# Altium PCB Digital_Input_PCB.PcbDoc (part 1 of 3)
Units mil, origin at the board's own origin, x right, y up, seen from the top; angles counter-clockwise.
Board outline 5600 x 4000 mil, 4 copper layers (Top Layer, Plane(Gnd), Plane(Power), Bottom Layer), stack 23.756 mil thick; 260 components, 287 nets, 712 pads, 291 vias.
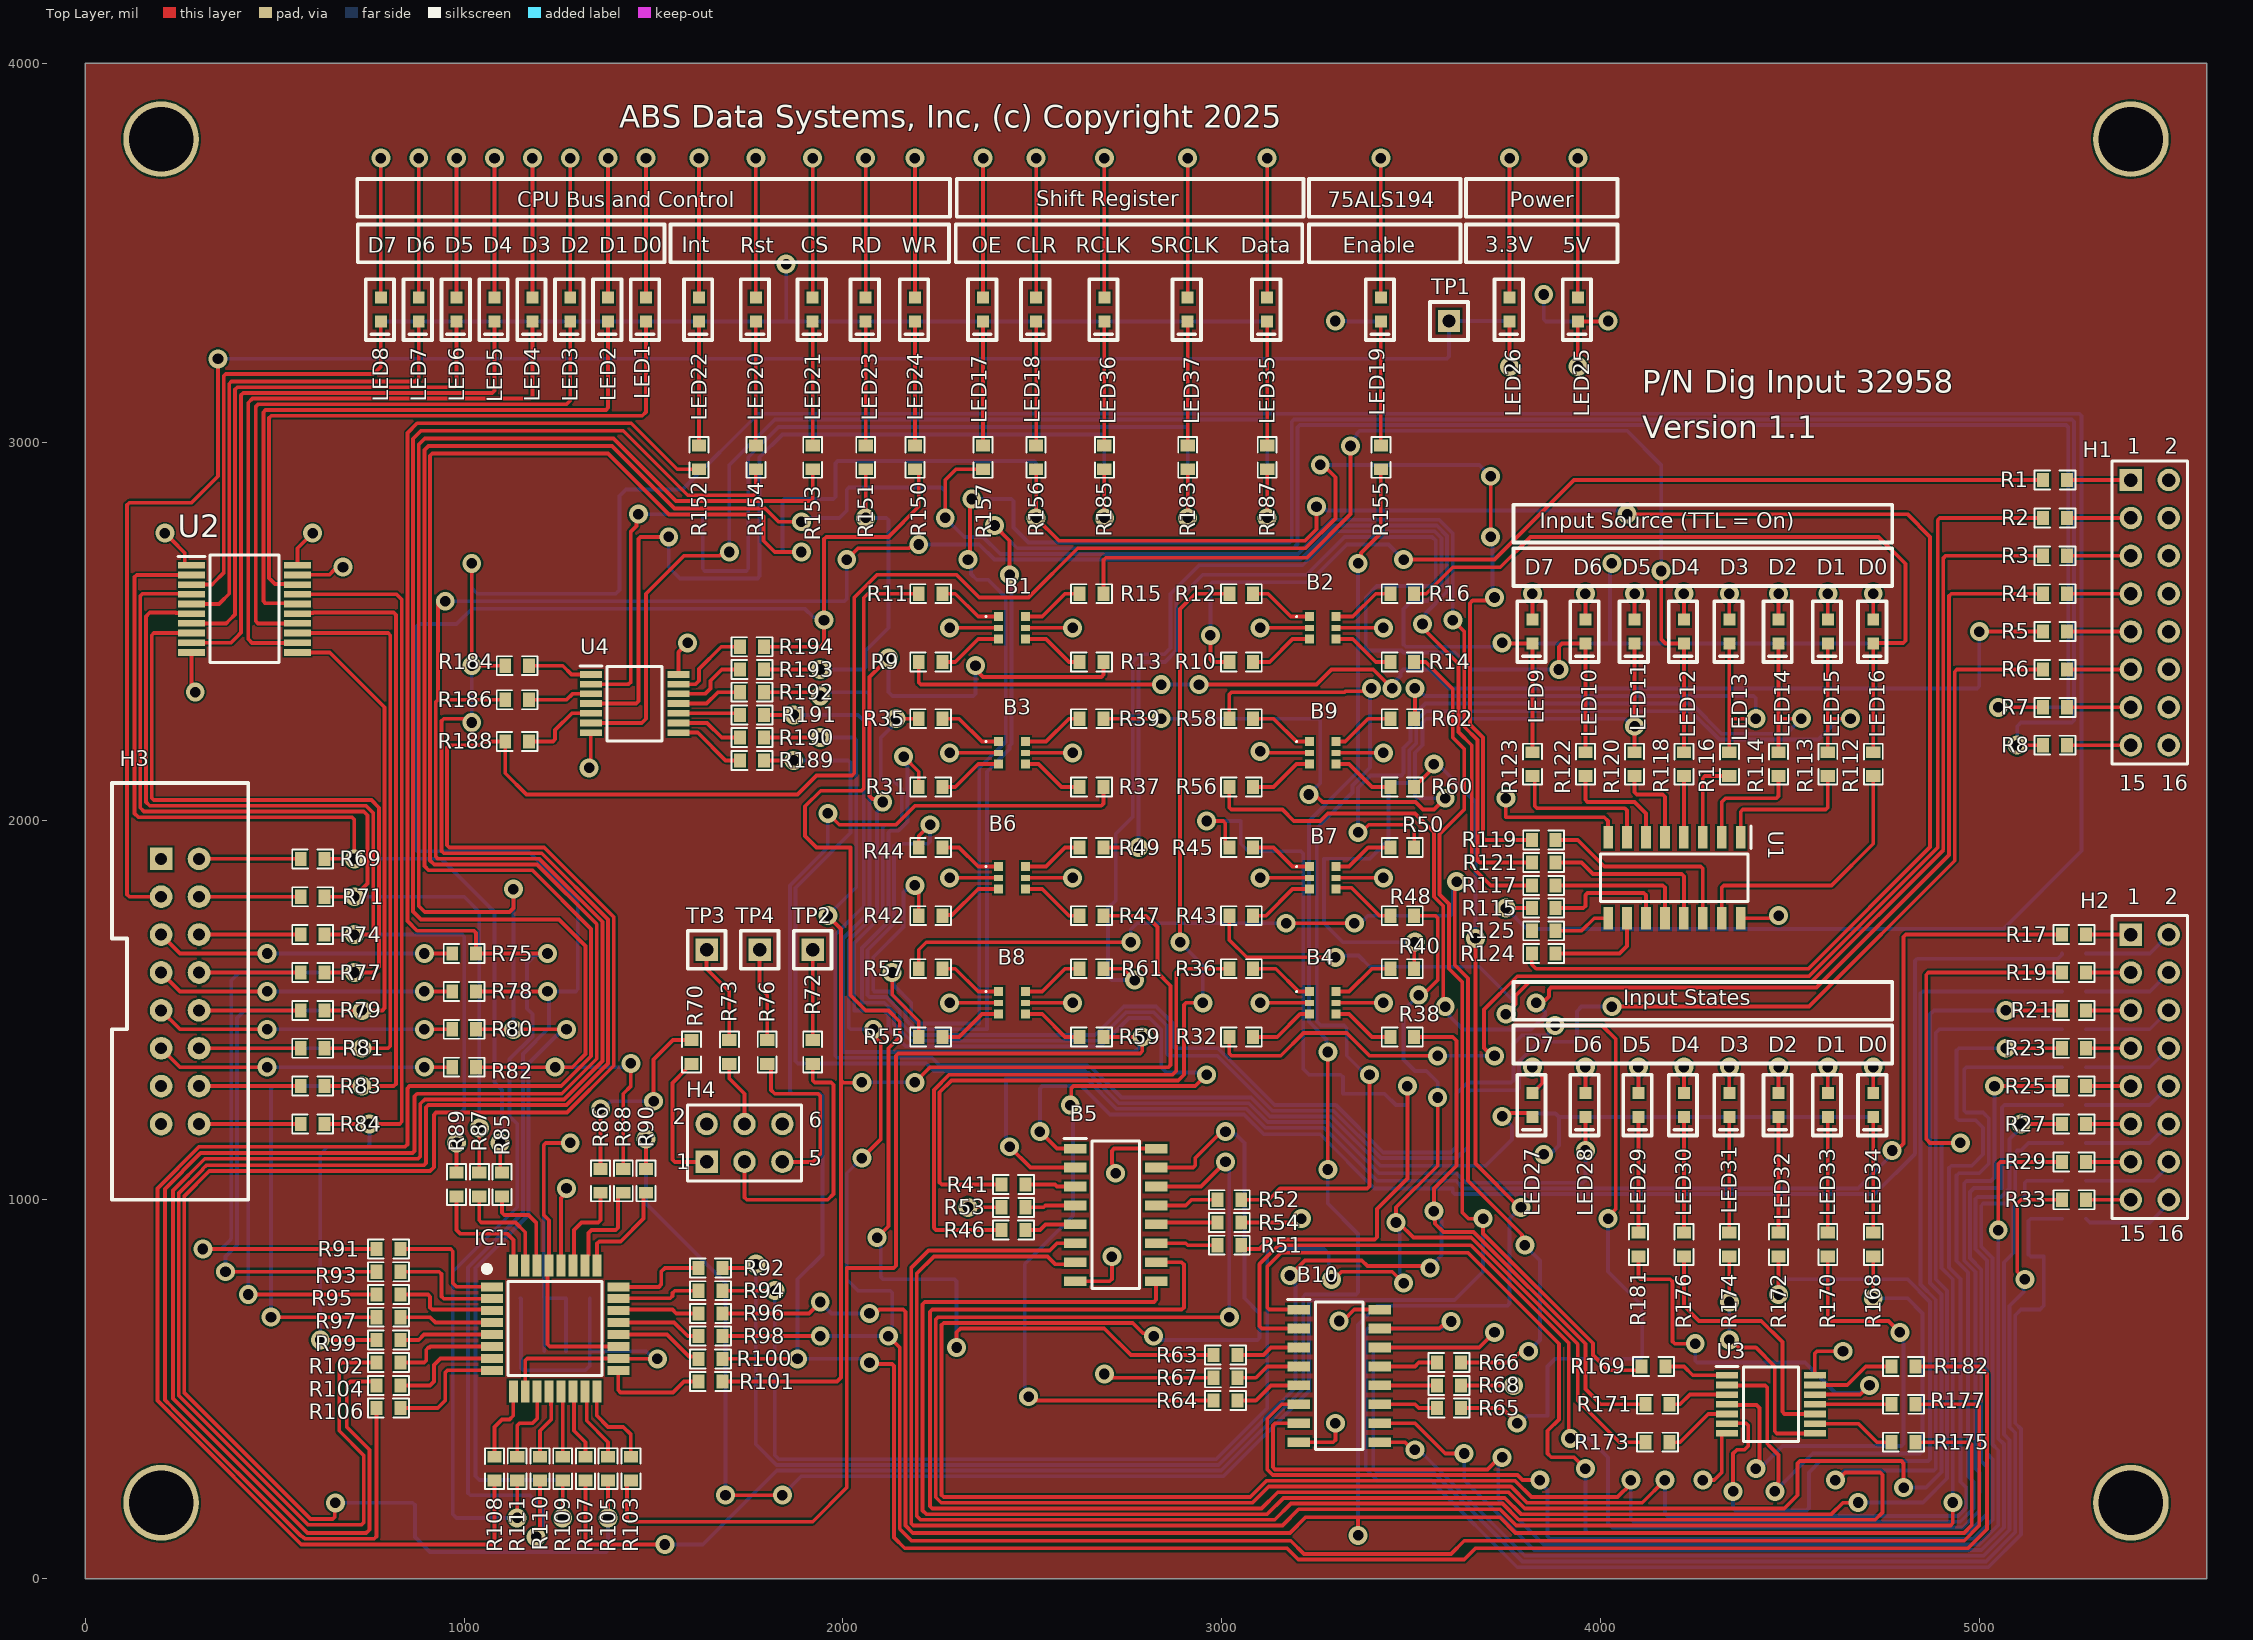
[diagram p0: Top Layer view]
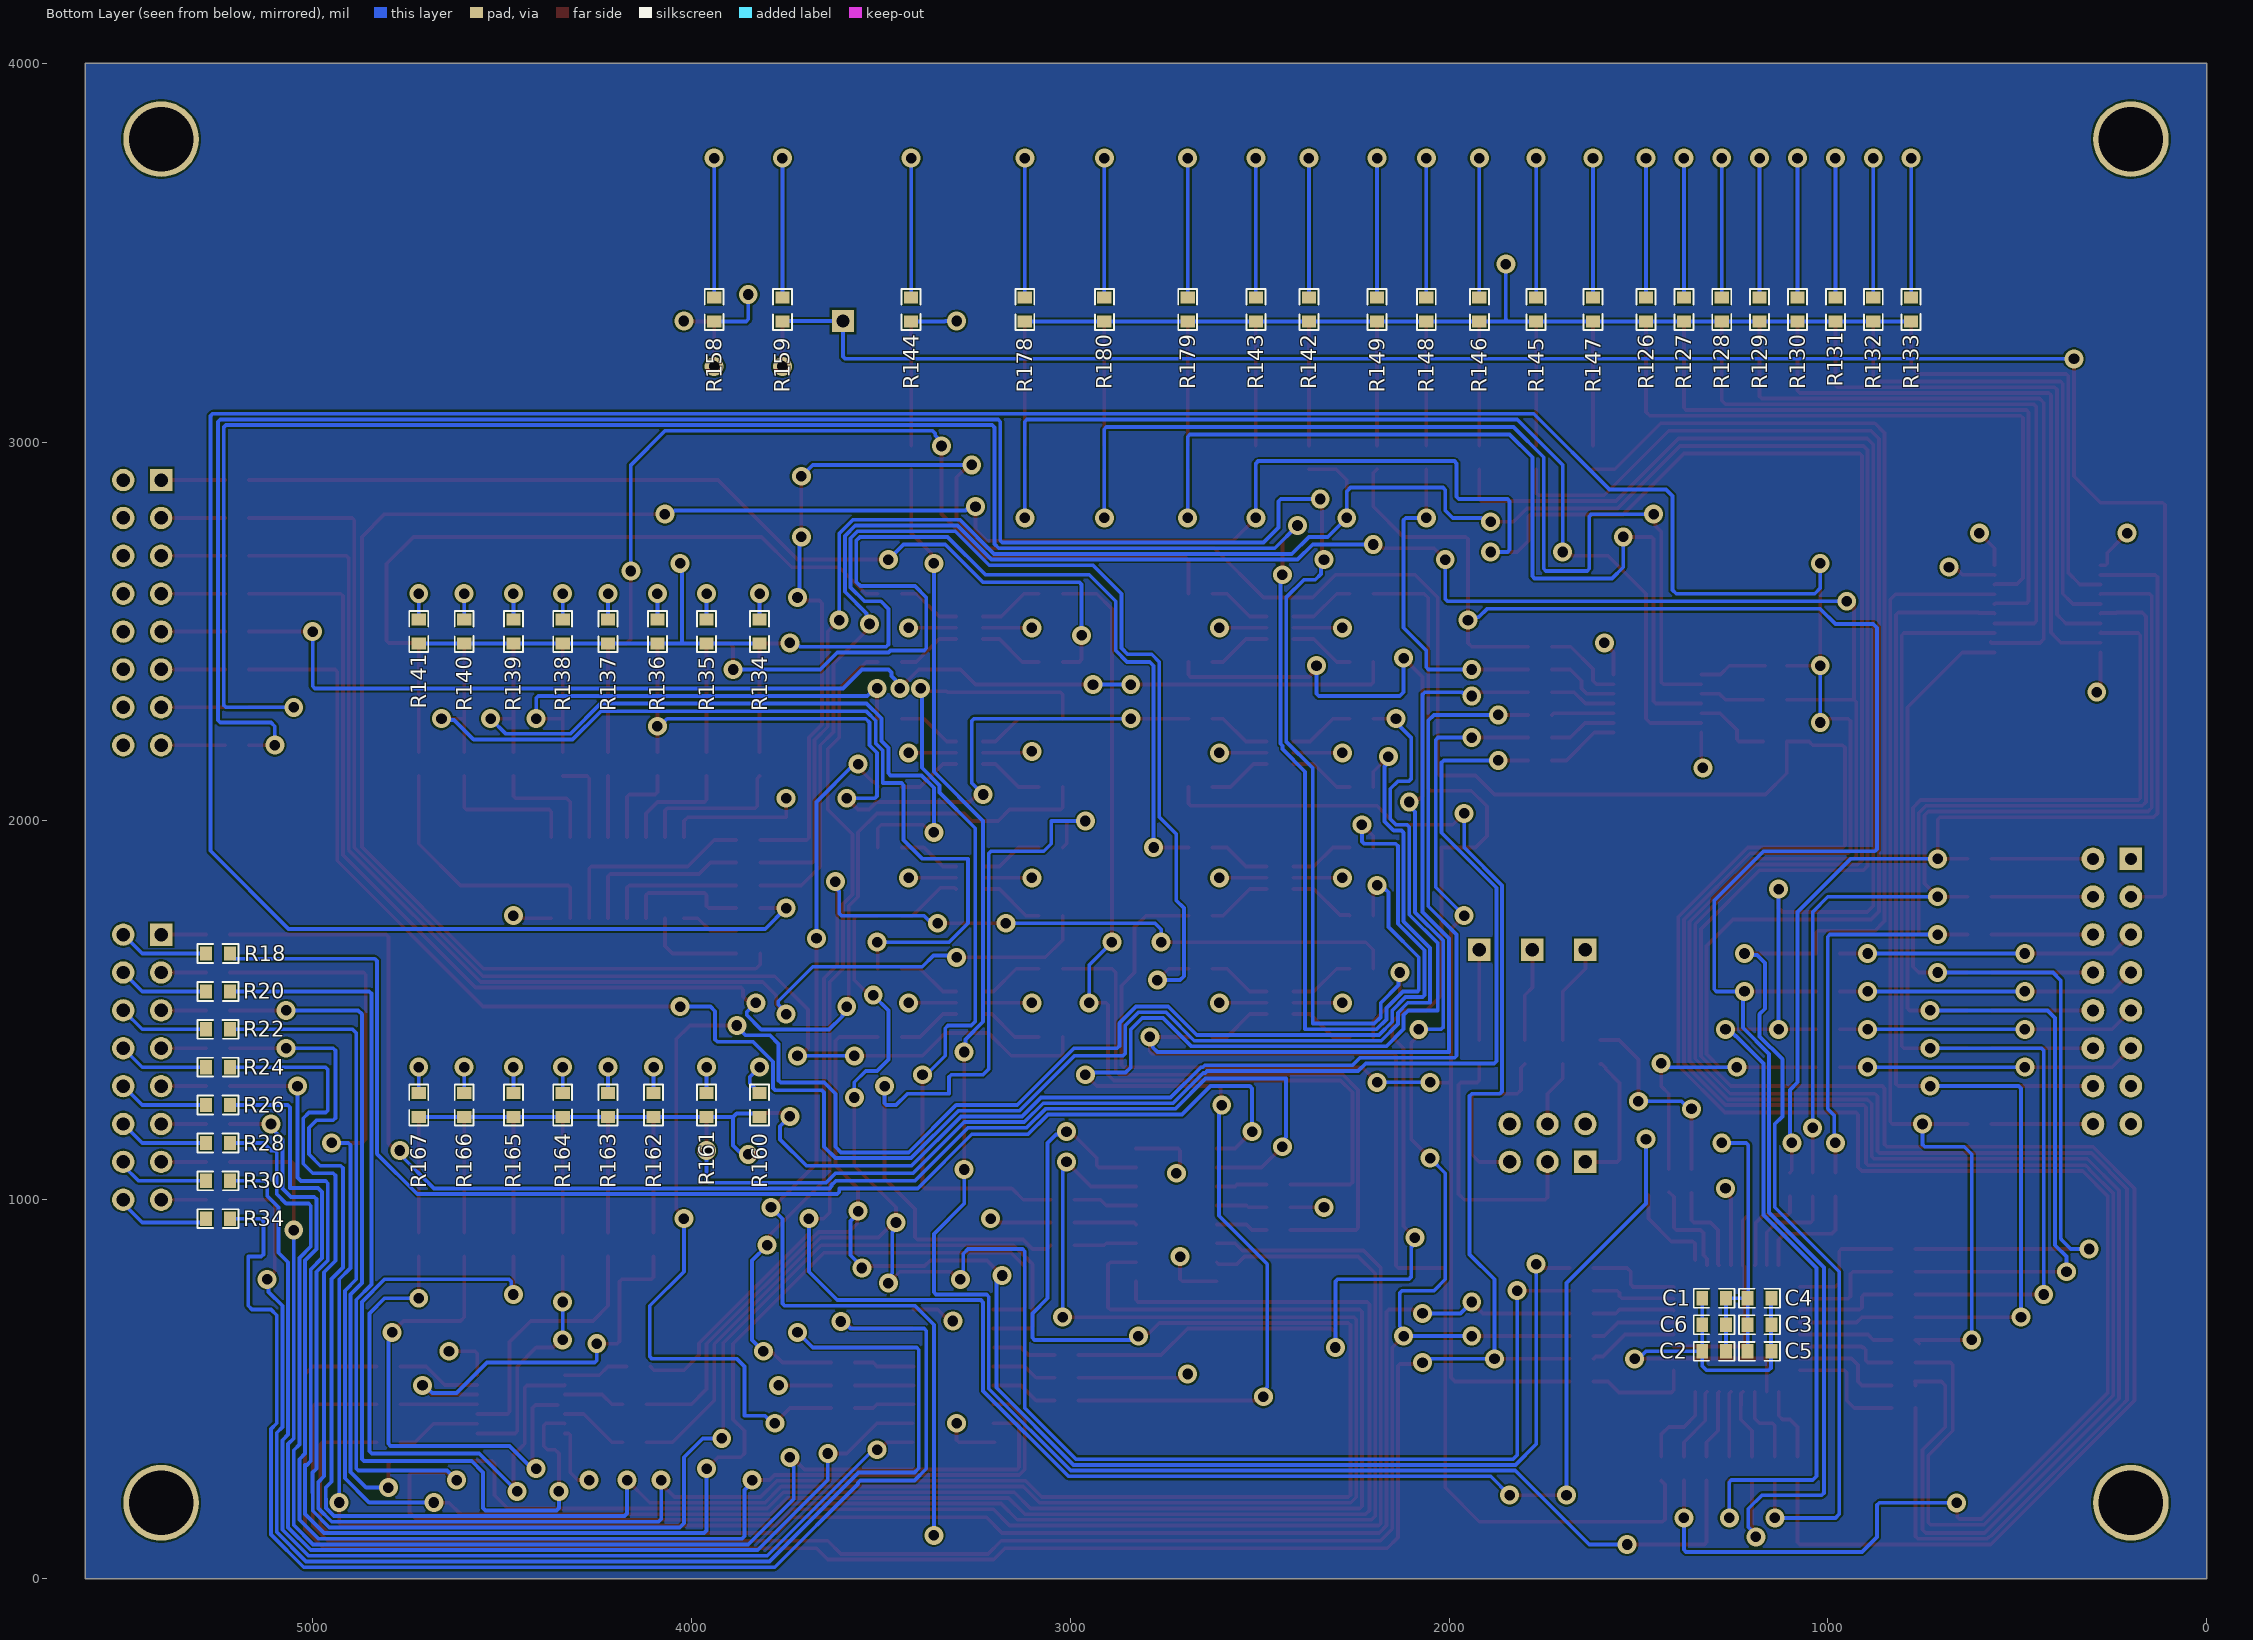
[diagram p1: Bottom Layer view, seen from below]
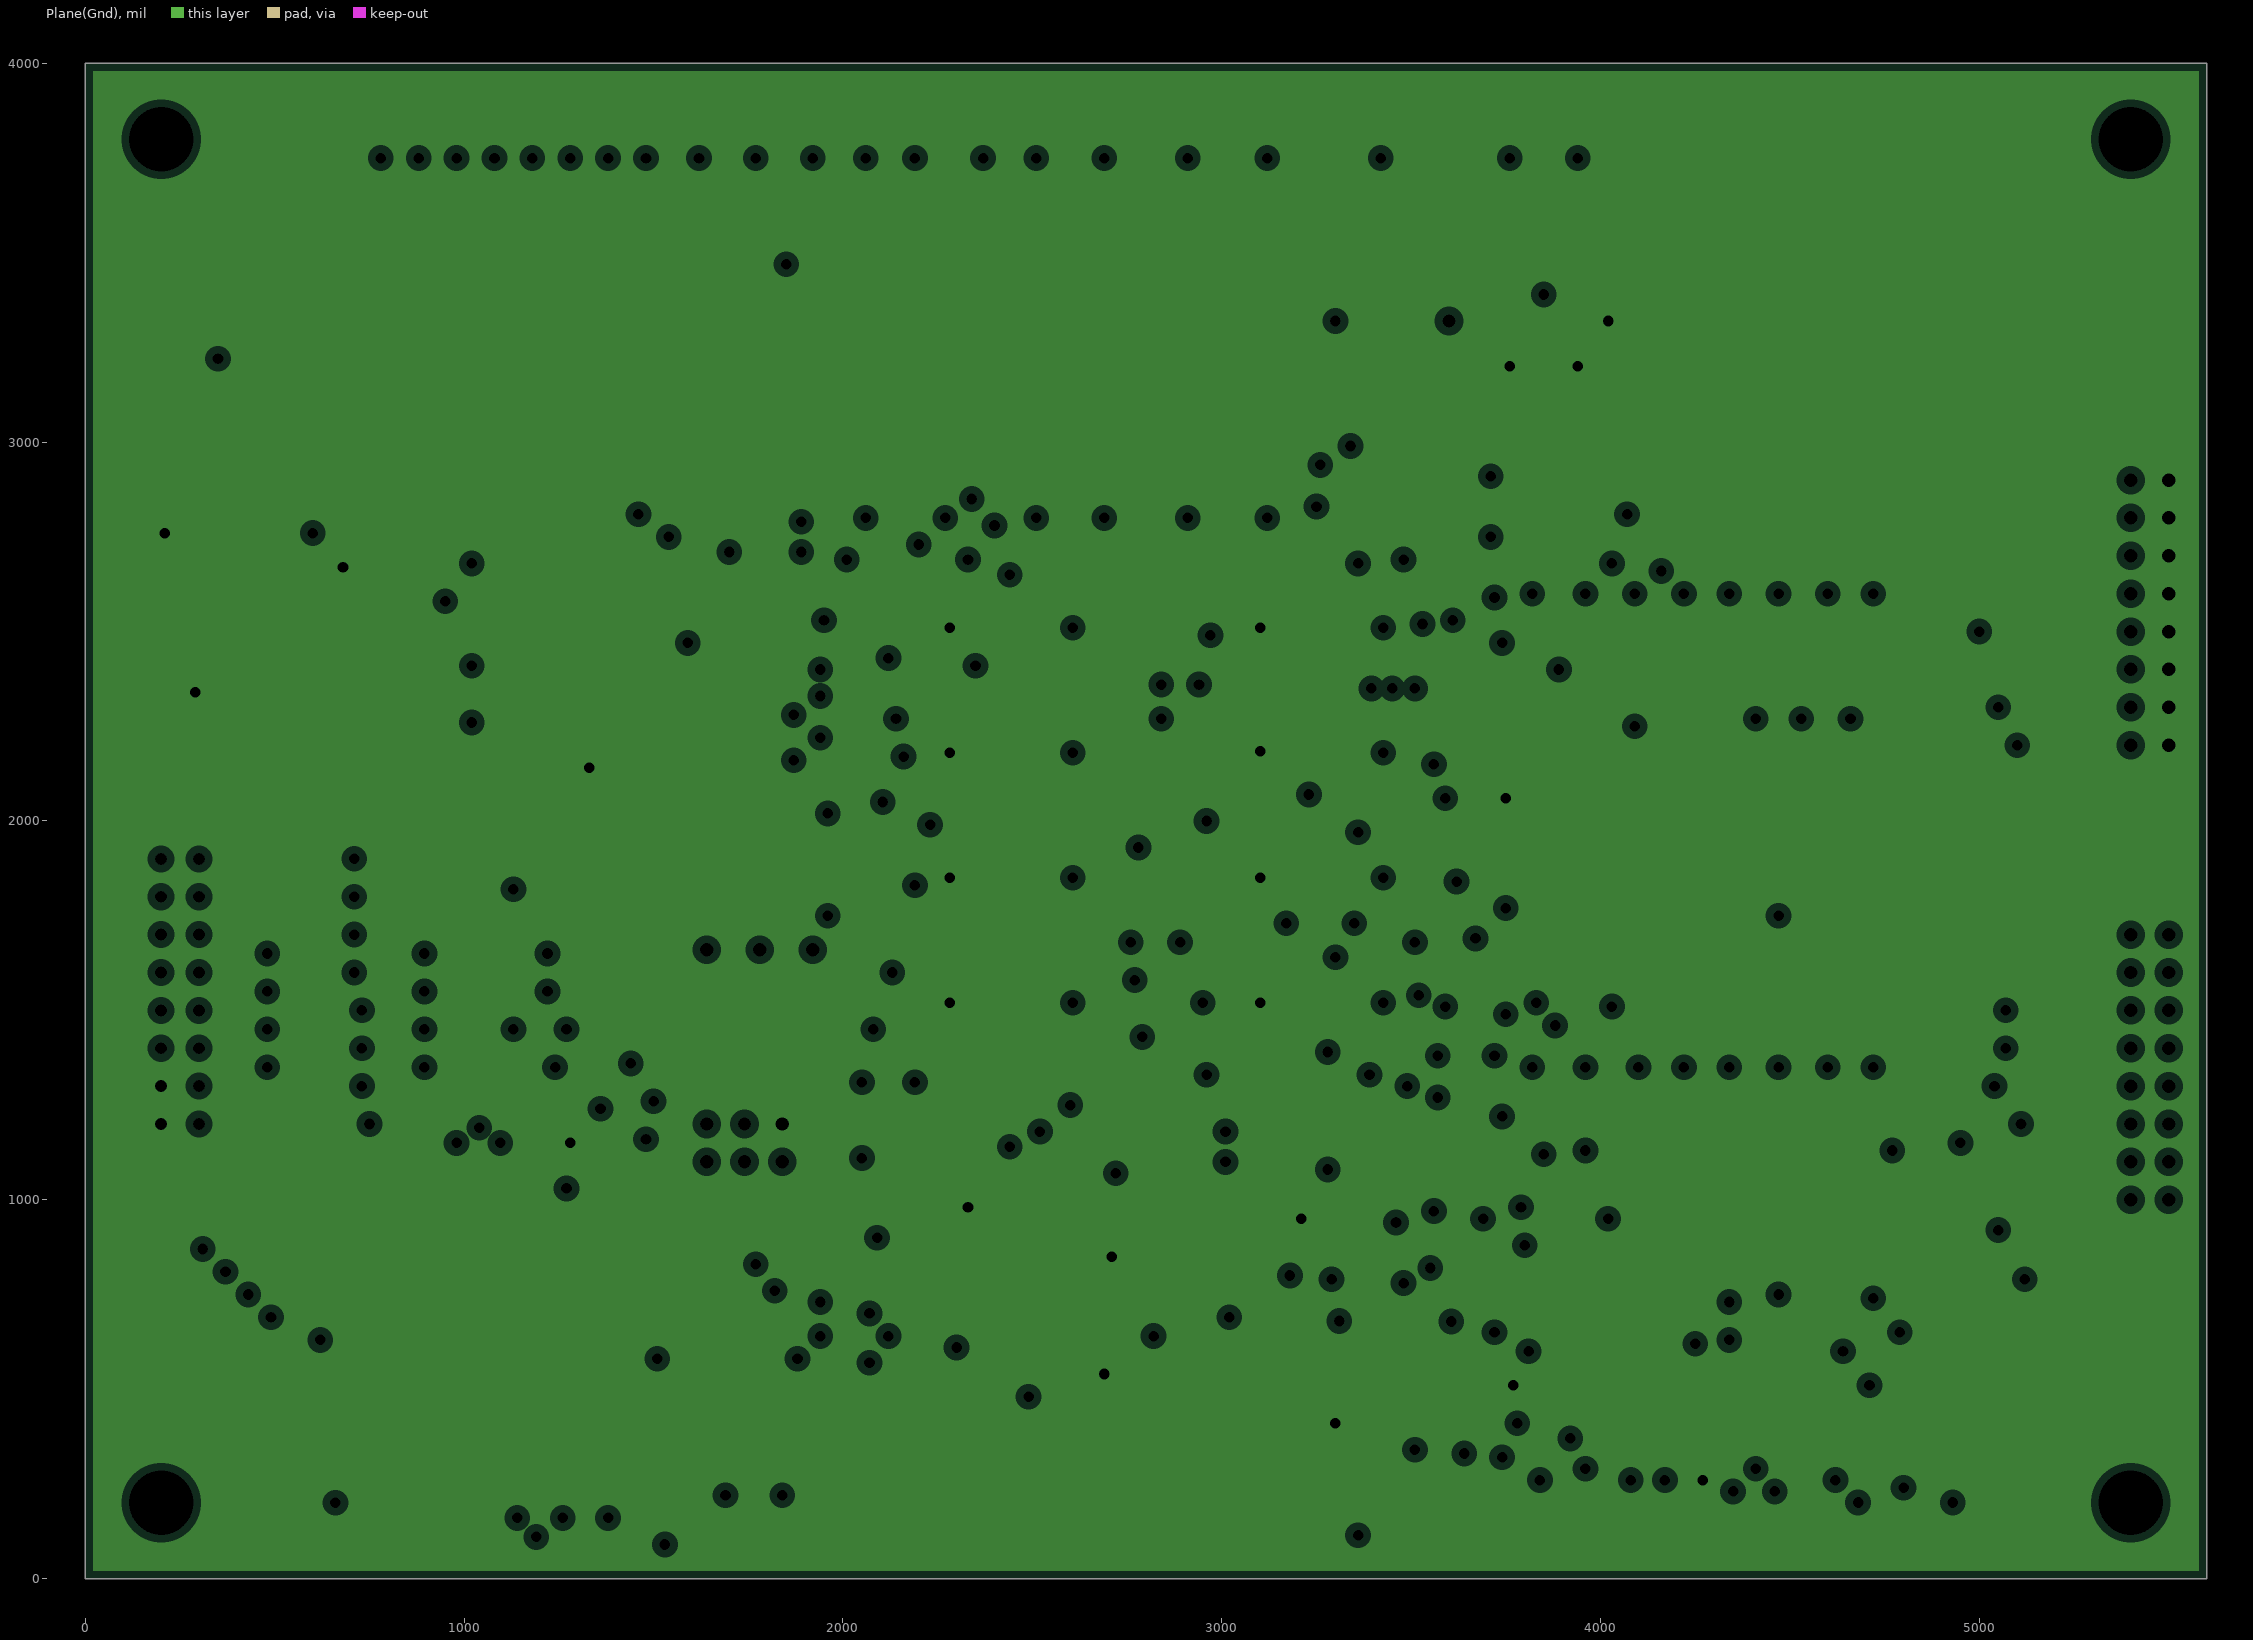
[diagram p2: Plane(Gnd), clearances drawn from the general rule]
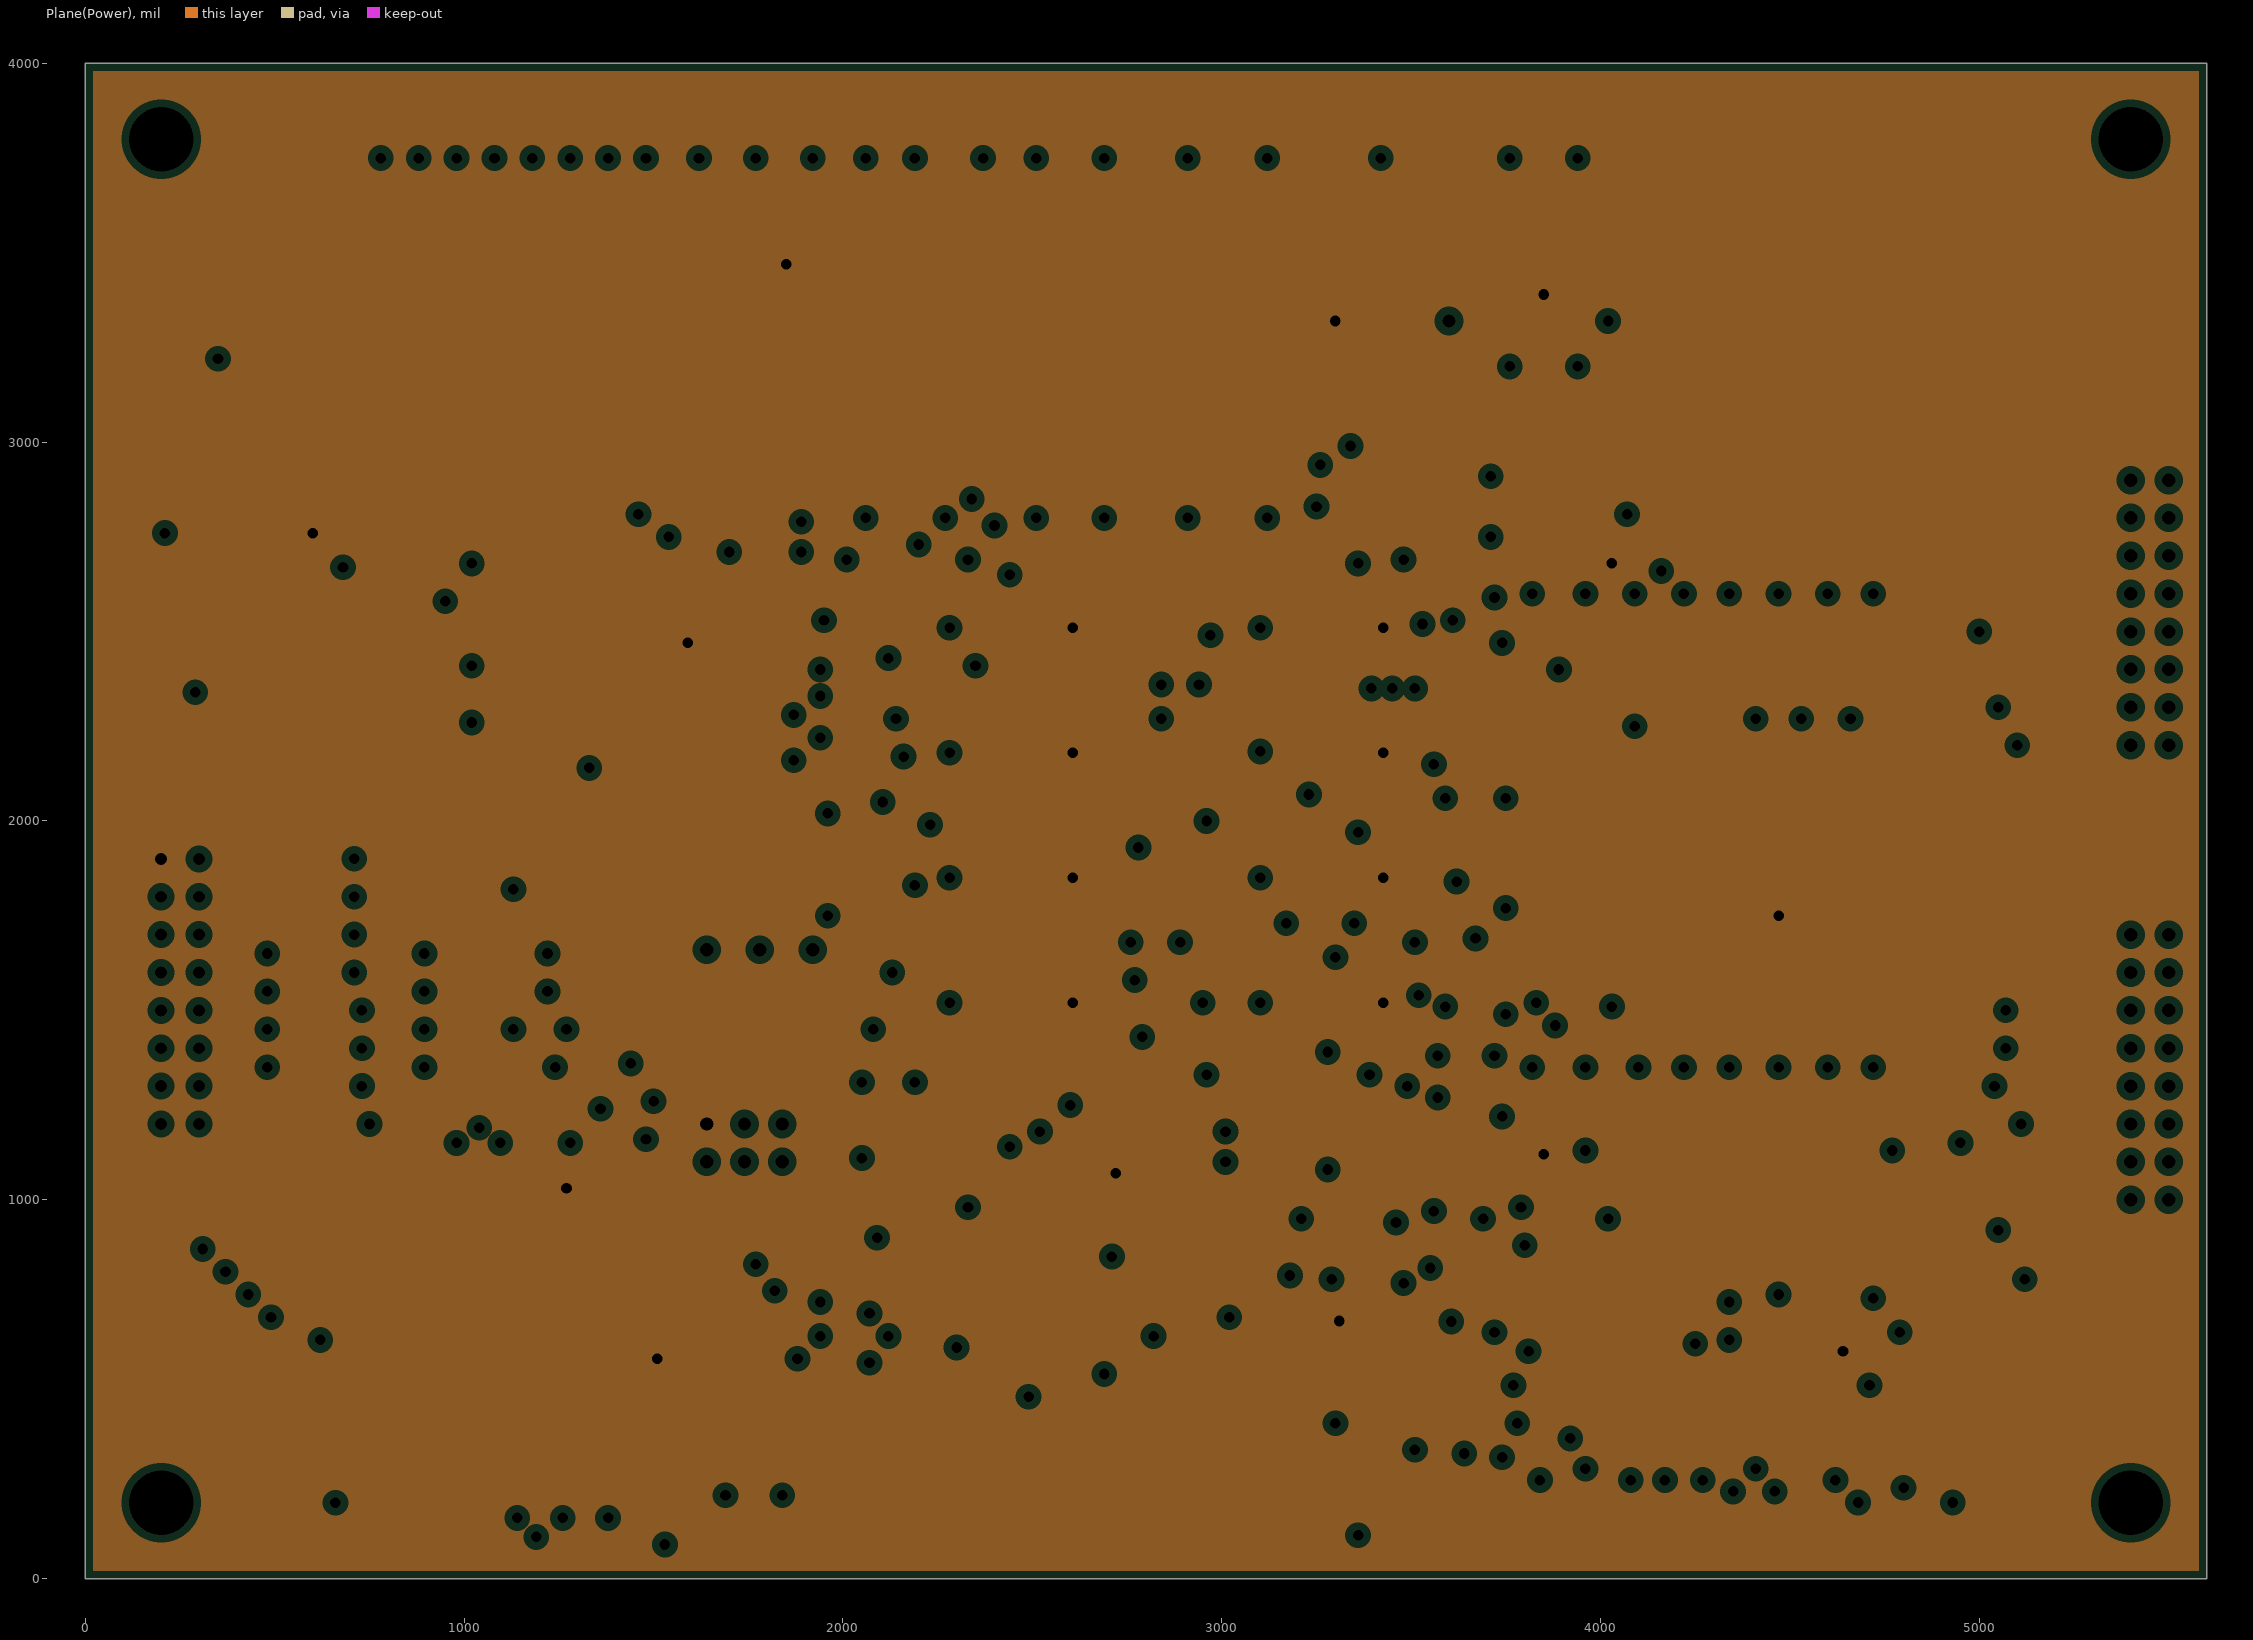
[diagram p3: Plane(Power), clearances drawn from the general rule]
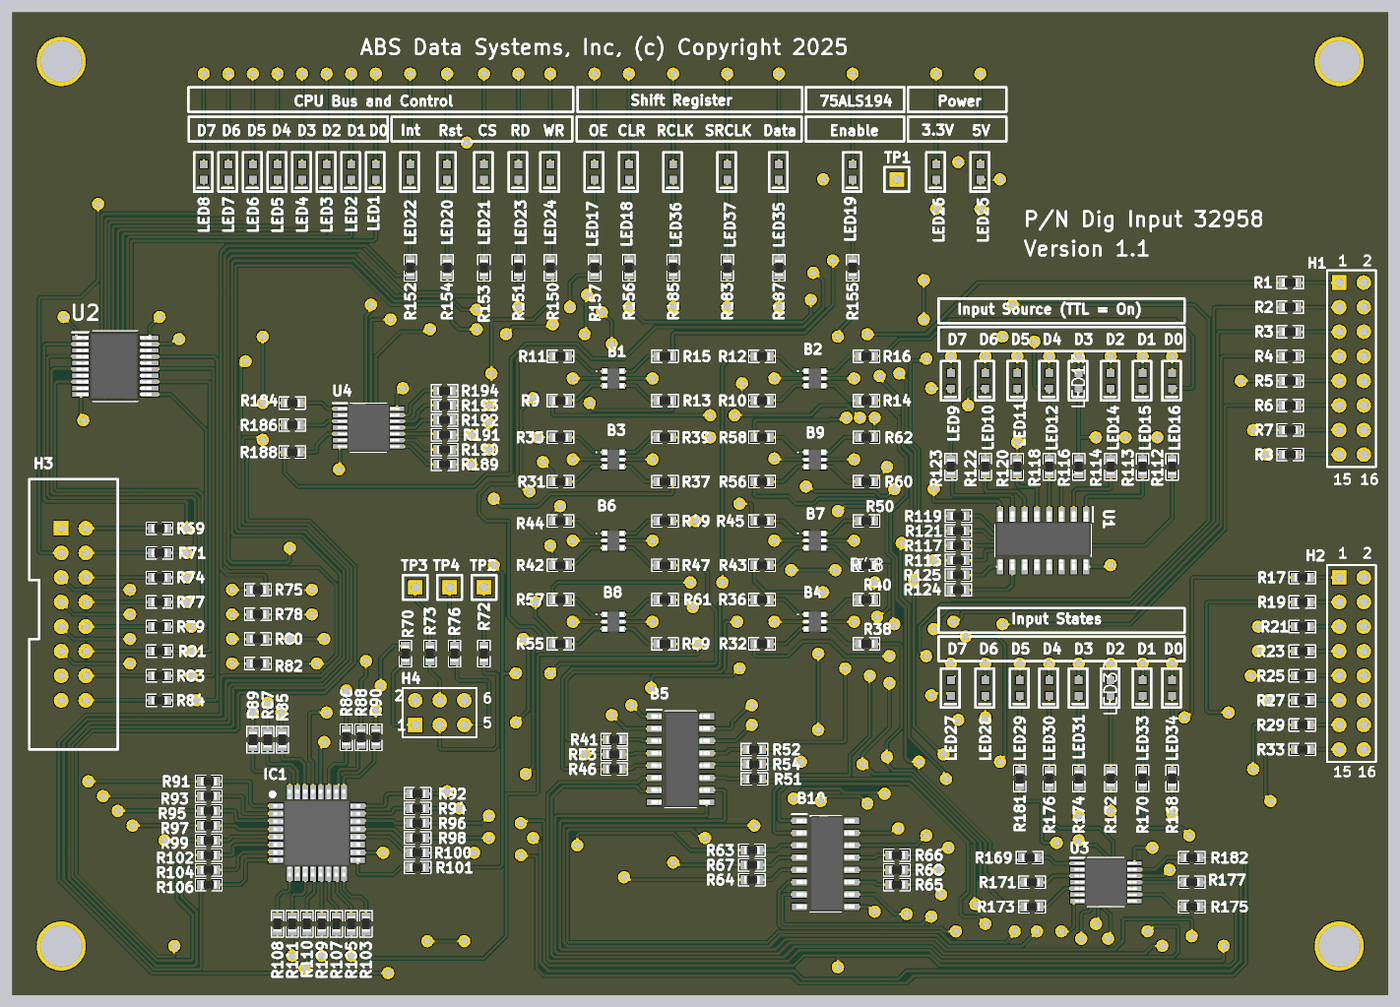
[diagram p5: 3D render of the assembled board from above, using the file's embedded part models]
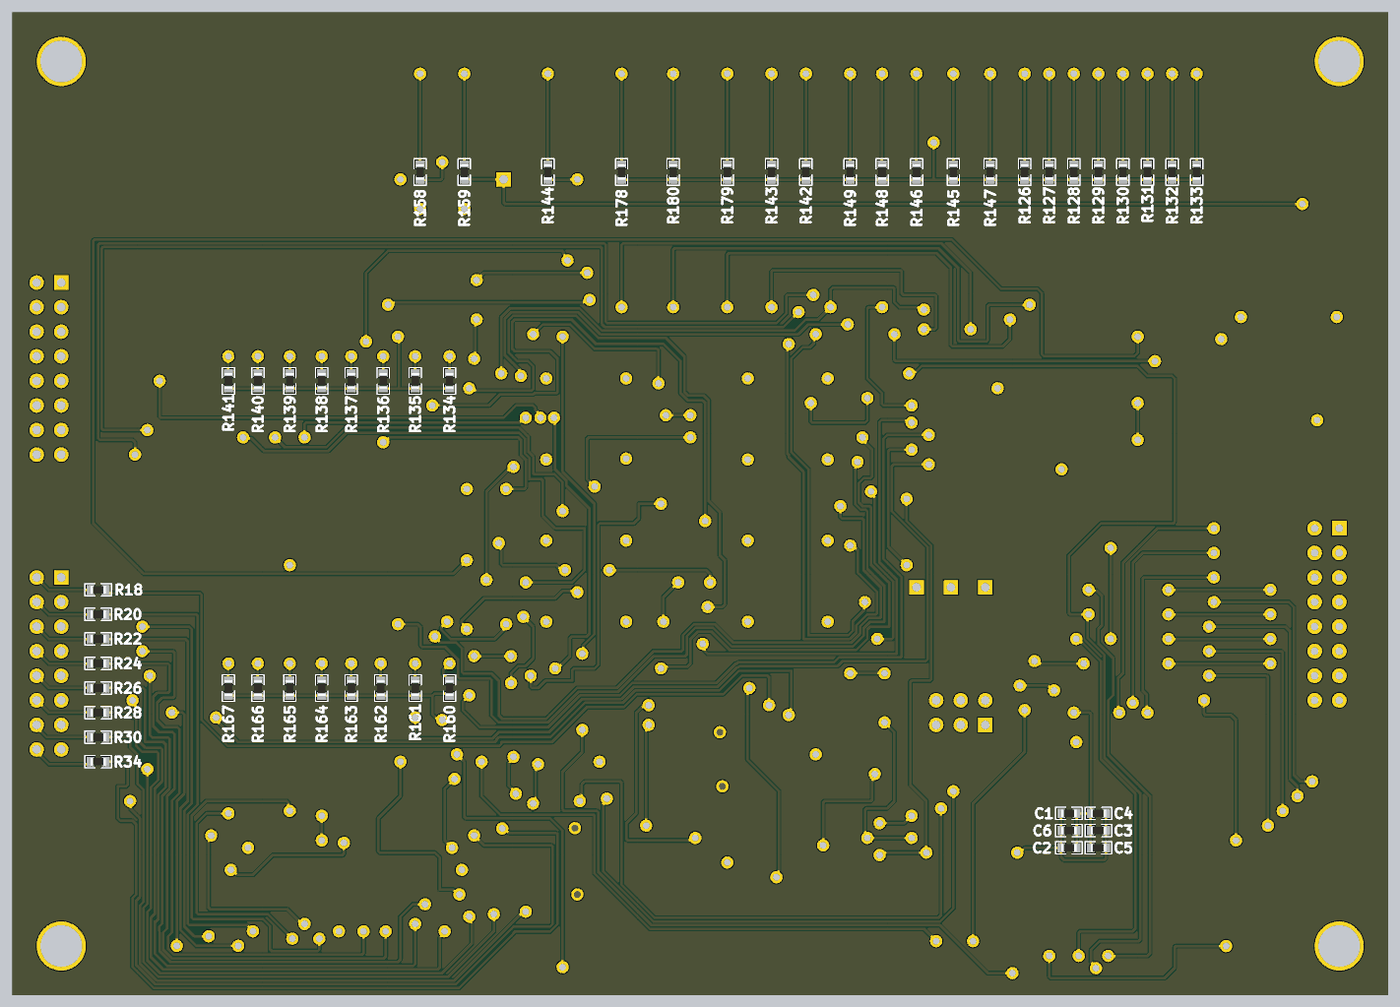
[diagram p6: 3D render of the assembled board from below, using the file's embedded part models]

## Layer stack, top to bottom
Top Solder: solder mask 0.4, Solder Resist, Dk 3.5
Top Layer: signal copper 1.4
Dielectric 2: prepreg 2.8, PP-006, Dk 4.1
Plane(Gnd): plane copper 1.378, net GND
Dielectric 1: dielectric 12.6, FR-4, Dk 4.8
Plane(Power): plane copper 1.378, net +5
Dielectric 3: prepreg 2.8, PP-006, Dk 4.1
Bottom Layer: signal copper 1.4
Bottom Solder: solder mask 0.4, Solder Resist, Dk 3.5

## Board outline
0,0 0,4000 5600,4000 5600,0

## Design rules (kind name [scope] priority, off if disabled: settings)
Clearance [All] p1: gap=5 ignorepadtopadclearanceinfootprint=FALSE
HoleSize [All] p1: absolutevalues=TRUE maxlimit=200 minlimit=1 maxpercent=80.000 minpercent=20.000
HoleToHoleClearance [All] p1: gap=5 allowstackedmicrovias=TRUE
MinimumSolderMaskSliver [All] p1: minsoldermaskwidth=1.5
PlaneClearance [All] p1: clearance=20
PlaneConnect [All] p1: planeconnectstyle=Relief reliefexpansion=20 reliefentries=4 reliefconductorwidth=10 reliefairgap=10
PolygonConnect [All] p1: connectstyle=Relief reliefconductorwidth=10 reliefentries=4 polygonreliefangle="90 Angle" airgapwidth=10
RoutingVias [All] p1: holewidth=28 width=50 viastyle="Through Hole" minholewidth=28 minwidth=50 maxholewidth=28 maxwidth=50
SilkToSilkClearance [All] p1: silktosilkclearance=4
SilkToSolderMaskClearance [IsPad] p1: minsilkscreentomaskgap=3.5 clearancetoexposedcopper=TRUE
SolderMaskExpansion [All] p1: expansion=4 istentingtop=FALSE
Width [All] p1: maxlimit=10 minlimit=5 preferedwidth=10 minimp=50.000000 maximp=50.000000 favimp=50.000000
23 further rules are at their usual default settings.

## Classes and differential pairs
component class Digital_Input: B1 B2 B3 B4 B5 B6 B7 B8 B9 B10 H1 H2 R1 R2 R3 R4 R5 R6 R7 R8 R9 R10 R11 R12 R13 R14 R15 R16 R17 R18 R19 R20 R21 R22 R23 R24 R25 R26 R27 R28 R29 R30 R31 R32 R33 R34 R35 R36 R37 R38 R39 R40 R41 R42 R43 R44 R45 R46 R47 R48 R49 R50 R51 R52 R53 R54 R55 R56 R57 R58 R59 R60 R61 R62 R63 R64 R65 R66 R67 R68
component class Digital_Input_LED_Monitor: LED1 LED2 LED3 LED4 LED5 LED6 LED7 LED8 LED9 LED10 LED11 LED12 LED13 LED14 LED15 LED16 LED17 LED18 LED19 LED20 LED21 LED22 LED23 LED24 LED25 LED26 LED27 LED28 LED29 LED30 LED31 LED32 LED33 LED34 LED35 LED36 LED37 R126 R127 R128 R129 R130 R131 R132 R133 R134 R135 R136 R137 R138 R139 R140 R141 R142 R143 R144 R145 R146 R147 R148 R149 R150 R151 R152 R153 R154 R155 R156 R157 R158 R159 R160 R161 R162 R163 R164 R165 R166 R167 R168 R169 R170 R171 R172 R173 R174 R175 R176 R177 R178 R179 R180 R181 R182 R183 R184 R185 R186 R187 R188 R189 R190 R191 R192 R193 R194 U2 U3 U4
component class Digital_Input_CPU: C1 C2 C3 C4 C5 C6 H3 H4 IC1 R69 R70 R71 R72 R73 R74 R75 R76 R77 R78 R79 R80 R81 R82 R83 R84 R85 R86 R87 R88 R89 R90 R91 R92 R93 R94 R95 R96 R97 R98 R99 R100 R101 R102 R103 R104 R105 R106 R107 R108 R109 R110 R111 R112 R113 R114 R115 R116 R117 R118 R119 R120 R121 R122 R123 R124 R125 TP1 TP2 TP3 TP4 U1

## Components (designator, comment, footprint, x,y, rotation, side; value= is the part's Value field where it differs from the comment)
B1 "TC7SB3157CFU" SOT-363-6 2446.5,2510 r0 top
B2 "TC7SB3157CFU" SOT-363-6 3266.5,2510 r0 top
B3 "TC7SB3157CFU" SOT-363-6 2446.5,2180 r0 top
B4 "TC7SB3157CFU" SOT-363-6 3266.5,1520 r0 top
B5 "AM26C32CDR" SOIC127P600X175-16N 2720,960 r0 top locked
B6 "TC7SB3157CFU" SOT-363-6 2446.5,1850 r0 top
B7 "TC7SB3157CFU" SOT-363-6 3266.5,1850 r0 top
B8 "TC7SB3157CFU" SOT-363-6 2446.5,1520 r0 top
B9 "TC7SB3157CFU" SOT-363-6 3266.5,2180 r0 top
B10 "AM26C32CDR" SOIC127P600X175-16N 3310,535 r0 top locked
C1 "1uf" 0603 1300,740 r180 bottom
C2 "100nf" 0603 1300,600 r180 bottom
C3 "1uf" 0603 1180,670 r0 bottom
C4 "100nf" 0603 1180,740 r0 bottom
C5 "1uf" 0603 1180,600 r0 bottom
C6 "100nf" 0603 1300,670 r180 bottom
H1 "Header_IDC_2x8" HDR2X8 5400,2900 r270 top locked
H2 "Header_IDC_2x8" HDR2X8 5400,1700 r270 top locked
H3 "Header_IDC_2x8" HEADER16 200,1900 r0 top locked
H4 "UDPI Programmer" HDR2X3 1640,1100 r0 top locked
IC1 "AVR64DD32-I_PT" QFP80P900X900X120-32N 1240,660 r0 top locked
LED1 "green" 0603_Diode 1480,3350 r90 top locked
LED2 "green" 0603_Diode 1380,3350 r90 top locked
LED3 "green" 0603_Diode 1280,3350 r90 top locked
LED4 "green" 0603_Diode 1180,3350 r90 top locked
LED5 "green" 0603_Diode 1080,3350 r90 top locked
LED6 "green" 0603_Diode 980,3350 r90 top locked
LED7 "green" 0603_Diode 880,3350 r90 top locked
LED8 "green" 0603_Diode 780,3350 r90 top locked
LED9 "green" 0603_Diode 3820,2500 r90 top locked
LED10 "green" 0603_Diode 3960,2500 r90 top locked
LED11 "green" 0603_Diode 4090,2500 r90 top locked
LED12 "green" 0603_Diode 4220,2500 r90 top locked
LED13 "green" 0603_Diode 4340,2500 r90 top locked
LED14 "green" 0603_Diode 4470,2500 r90 top locked
LED15 "green" 0603_Diode 4600,2500 r90 top locked
LED16 "green" 0603_Diode 4720,2500 r90 top locked
LED17 "green" 0603_Diode 2370,3350 r90 top locked
LED18 "green" 0603_Diode 2510,3350 r90 top locked
LED19 "green" 0603_Diode 3420,3350 r90 top locked
LED20 "green" 0603_Diode 1770,3350 r90 top locked
LED21 "green" 0603_Diode 1920,3350 r90 top locked
LED22 "green" 0603_Diode 1620,3350 r90 top locked
LED23 "green" 0603_Diode 2060,3350 r90 top locked
LED24 "green" 0603_Diode 2190,3350 r90 top locked
LED25 "green" 0603_Diode 3940,3350 r90 top locked
LED26 "green" 0603_Diode 3760,3350 r90 top locked
LED27 "green" 0603_Diode 3820,1250 r90 top locked
LED28 "green" 0603_Diode 3960,1250 r90 top locked
LED29 "green" 0603_Diode 4100,1250 r90 top locked
LED30 "green" 0603_Diode 4220,1250 r90 top locked
LED31 "green" 0603_Diode 4340,1250 r90 top locked
LED32 "green" 0603_Diode 4470,1250 r90 top locked
LED33 "green" 0603_Diode 4600,1250 r90 top locked
LED34 "green" 0603_Diode 4720,1250 r90 top locked
LED35 "green" 0603_Diode 3120,3350 r90 top locked
LED36 "green" 0603_Diode 2690,3350 r90 top locked
LED37 "green" 0603_Diode 2910,3350 r90 top locked
R1 "0R" 0603 5200,2900 r0 top locked
R2 "0R" 0603 5200,2800 r0 top locked
R3 "0R" 0603 5200,2700 r0 top locked
R4 "0R" 0603 5200,2600 r0 top locked
R5 "0R" 0603 5200,2500 r0 top locked
R6 "0R" 0603 5200,2400 r0 top locked
R7 "0R" 0603 5200,2300 r0 top locked
R8 "0R" 0603 5200,2200 r0 top locked
R9 "0R" 0603 2231.5,2420 r180 top
R10 "0R" 0603 3051.5,2420 r180 top
R11 "0R" 0603 2231.5,2600 r180 top
R12 "0R" 0603 3051.5,2600 r180 top
R13 "0R" 0603 2656.5,2420 r180 top
R14 "0R" 0603 3476.5,2420 r180 top
R15 "0R" 0603 2656.5,2600 r0 top
R16 "0R" 0603 3476.5,2600 r0 top
R17 "0R" 0603 5250,1700 r0 top
R18 "0R" 0603 5250,1650 r180 bottom
R19 "0R" 0603 5250,1600 r0 top
R20 "0R" 0603 5250,1550 r180 bottom
R21 "0R" 0603 5250,1500 r0 top
R22 "0R" 0603 5250,1450 r180 bottom
R23 "0R" 0603 5250,1400 r0 top
R24 "0R" 0603 5250,1350 r180 bottom
R25 "0R" 0603 5250,1300 r0 top
R26 "0R" 0603 5250,1250 r180 bottom
R27 "0R" 0603 5250,1200 r0 top
R28 "0R" 0603 5250,1150 r180 bottom
R29 "0R" 0603 5250,1100 r0 top
R30 "0R" 0603 5250,1050 r180 bottom
R31 "0R" 0603 2231.5,2090 r180 top
R32 "0R" 0603 3051.5,1430 r180 top locked
R33 "0R" 0603 5250,1000 r0 top
R34 "0R" 0603 5250,950 r180 bottom
R35 "0R" 0603 2231.5,2270 r180 top
R36 "0R" 0603 3051.5,1610 r180 top
R37 "0R" 0603 2656.5,2090 r180 top
R38 "0R" 0603 3476.5,1430 r180 top
R39 "0R" 0603 2656.5,2270 r0 top
R40 "0R" 0603 3476.5,1610 r0 top
R41 "0R" 0603 2450,1040 r0 top locked
R42 "0R" 0603 2231.5,1750 r180 top
R43 "0R" 0603 3051.5,1750 r180 top
R44 "0R" 0603 2231.5,1930 r180 top
R45 "0R" 0603 3051.5,1930 r180 top
R46 "0R" 0603 2450,920 r0 top locked
R47 "0R" 0603 2656.5,1750 r180 top
R48 "0R" 0603 3476.5,1750 r180 top
R49 "0R" 0603 2656.5,1930 r0 top
R50 "0R" 0603 3476.5,1930 r0 top
R51 "0R" 0603 3020,880 r180 top locked
R52 "0R" 0603 3020,1000 r180 top locked
R53 "0R" 0603 2450,980 r180 top locked
R54 "0R" 0603 3020,940 r0 top locked
R55 "0R" 0603 2231.5,1430 r180 top
R56 "0R" 0603 3051.5,2090 r180 top
R57 "0R" 0603 2231.5,1610 r180 top
R58 "0R" 0603 3051.5,2270 r180 top
R59 "0R" 0603 2656.5,1430 r180 top
R60 "0R" 0603 3476.5,2090 r180 top locked
R61 "0R" 0603 2656.5,1610 r0 top
R62 "0R" 0603 3476.5,2270 r0 top
R63 "0R" 0603 3010,590 r0 top locked
R64 "0R" 0603 3010,470 r0 top locked
R65 "0R" 0603 3600,450 r180 top locked
R66 "0R" 0603 3600,570 r180 top locked
R67 "0R" 0603 3010,530 r180 top locked
R68 "0R" 0603 3600,510 r0 top locked
R69 "0R" 0603 600,1900 r180 top locked
R70 "0R" 0603 1600,1390 r270 top
R71 "0R" 0603 600,1800 r180 top locked
R72 "0R" 0603 1920,1390 r270 top
R73 "0R" 0603 1700,1390 r90 top
R74 "0R" 0603 600,1700 r180 top locked
R75 "0R" 0603 1000,1650 r0 top
R76 "0R" 0603 1800,1390 r270 top
R77 "0R" 0603 600,1600 r180 top locked
R78 "0R" 0603 1000,1550 r0 top
R79 "0R" 0603 600,1500 r180 top locked
R80 "0R" 0603 1000,1450 r0 top
R81 "0R" 0603 600,1400 r180 top locked
R82 "0R" 0603 1000,1350 r0 top
R83 "0R" 0603 600,1300 r180 top locked
R84 "0R" 0603 600,1200 r180 top locked
R85 "0R" 0603 1100,1040 r270 top
R86 "0R" 0603 1360,1050 r90 top
R87 "0R" 0603 1040,1040 r270 top
R88 "0R" 0603 1420,1050 r90 top
R89 "0R" 0603 980,1040 r270 top
R90 "0R" 0603 1480,1050 r90 top
R91 "0R" 0603 800,870 r0 top
R92 "0R" 0603 1650,820 r0 top
R93 "0R" 0603 800,810 r0 top
R94 "0R" 0603 1650,760 r0 top
R95 "0R" 0603 800,750 r0 top
R96 "0R" 0603 1650,700 r0 top
R97 "0R" 0603 800,690 r0 top
R98 "0R" 0603 1650,640 r0 top
R99 "0R" 0603 800,630 r0 top
R100 "0R" 0603 1650,580 r0 top
R101 "0R" 0603 1650,520 r0 top
R102 "0R" 0603 800,570 r0 top
R103 "0R" 0603 1440,290 r270 top
R104 "0R" 0603 800,510 r0 top
R105 "0R" 0603 1380,290 r270 top
R106 "0R" 0603 800,450 r0 top
R107 "0R" 0603 1320,290 r270 top
R108 "0R" 0603 1080,290 r90 top
R109 "0R" 0603 1260,290 r270 top
R110 "0R" 0603 1200,290 r270 top
R111 "0R" 0603 1140,290 r270 top
R112 "0R" 0603 4720,2150 r90 top locked
R113 "0R" 0603 4600,2150 r90 top locked
R114 "0R" 0603 4470,2150 r90 top locked
R115 "0R" 0603 3850,1770 r0 top
R116 "0R" 0603 4340,2150 r90 top locked
R117 "0R" 0603 3850,1830 r0 top
R118 "0R" 0603 4220,2150 r90 top locked
R119 "0R" 0603 3850,1950 r0 top
R120 "0R" 0603 4090,2150 r90 top locked
R121 "0R" 0603 3850,1890 r0 top
R122 "0R" 0603 3960,2150 r90 top locked
R123 "0R" 0603 3820,2150 r90 top locked
R124 "0R" 0603 3850,1650 r0 top
R125 "0R" 0603 3850,1710 r180 top
R126 "180" 0603 1480,3350 r270 bottom locked
R127 "180" 0603 1380,3350 r270 bottom locked
R128 "180" 0603 1280,3350 r270 bottom locked
R129 "180" 0603 1180,3350 r270 bottom locked
R130 "180" 0603 1080,3350 r270 bottom locked
R131 "180" 0603 980,3350 r270 bottom locked
R132 "180" 0603 880,3350 r270 bottom locked
R133 "180" 0603 780,3350 r270 bottom locked
R134 "180" 0603 3820,2500 r270 bottom locked
R135 "180" 0603 3960,2500 r270 bottom locked
R136 "180" 0603 4090,2500 r270 bottom locked
R137 "180" 0603 4220,2500 r270 bottom locked
R138 "180" 0603 4340,2500 r270 bottom locked
R139 "180" 0603 4470,2500 r270 bottom locked
R140 "180" 0603 4600,2500 r270 bottom locked
R141 "180" 0603 4720,2500 r270 bottom locked
R142 "180" 0603 2370,3350 r270 bottom locked
R143 "180" 0603 2510,3350 r270 bottom locked
R144 "180" 0603 3420,3350 r270 bottom locked
R145 "180" 0603 1770,3350 r270 bottom locked
R146 "180" 0603 1920,3350 r270 bottom locked
R147 "180" 0603 1620,3350 r270 bottom locked
R148 "180" 0603 2060,3350 r270 bottom locked
R149 "180" 0603 2190,3350 r270 bottom locked
R150 "0R" 0603 2190,2960 r270 top locked
R151 "0R" 0603 2060,2960 r270 top locked
R152 "0R" 0603 1620,2960 r270 top locked
R153 "0R" 0603 1920,2960 r270 top locked
R154 "0R" 0603 1770,2960 r270 top locked
R155 "0R" 0603 3420,2960 r270 top
R156 "0R" 0603 2510,2960 r270 top locked
R157 "0R" 0603 2370,2960 r270 top locked
R158 "180" 0603 3940,3350 r270 bottom locked
R159 "180" 0603 3760,3350 r270 bottom locked
R160 "180" 0603 3820,1250 r270 bottom locked
R161 "180" 0603 3960,1250 r270 bottom locked
R162 "180" 0603 4100,1250 r270 bottom locked
R163 "180" 0603 4220,1250 r270 bottom locked
R164 "180" 0603 4340,1250 r270 bottom locked
R165 "180" 0603 4470,1250 r270 bottom locked
R166 "180" 0603 4600,1250 r270 bottom locked
R167 "180" 0603 4720,1250 r270 bottom locked
R168 "0R" 0603 4720,882 r270 top locked
R169 "0R" 0603 4140,560 r180 top locked
R170 "0R" 0603 4600,882 r270 top locked
R171 "0R" 0603 4150,460 r180 top locked
R172 "0R" 0603 4470,882 r270 top locked
R173 "0R" 0603 4150,360 r180 top locked
R174 "0R" 0603 4340,882 r270 top locked
R175 "0R" 0603 4800,360 r0 top locked
R176 "0R" 0603 4220,882 r270 top locked
R177 "0R" 0603 4800,460 r0 top locked
R178 "180" 0603 3120,3350 r270 bottom locked
R179 "180" 0603 2690,3350 r270 bottom locked
R180 "180" 0603 2910,3350 r270 bottom locked
R181 "0R" 0603 4100,882 r270 top locked
R182 "0R" 0603 4800,560 r0 top locked
R183 "0R" 0603 2910,2960 r270 top locked
R184 "0R" 0603 1140,2410 r180 top
R185 "0R" 0603 2690,2960 r270 top locked
R186 "0R" 0603 1140,2320 r180 top
R187 "0R" 0603 3120,2960 r270 top locked
R188 "0R" 0603 1140,2210 r180 top
R189 "0R" 0603 1760,2160 r180 top
R190 "0R" 0603 1760,2220 r0 top
R191 "0R" 0603 1760,2280 r180 top
R192 "0R" 0603 1760,2340 r0 top
R193 "0R" 0603 1760,2400 r180 top
R194 "0R" 0603 1760,2460 r0 top
TP1 "TP" TP 3600,3320 r0 top
TP2 "TP" TP 1920,1660 r0 top
TP3 "TP" TP 1640,1660 r0 top
TP4 "TP" TP 1780,1660 r0 top
U1 "SN74HC595DR" SOIC_16_Narrow 4195,1850 r270 top locked
U2 "SN74ABT240ADBR" SOP65P780X200-20N 420,2560 r0 top locked
U3 "SN74AC04PWR" SOP65P640X120-14N 4450,460 r0 top locked
U4 "SN74AC04PWR" SOP65P640X120-14N 1450,2310 r0 top

## Footprints (in the part's own frame and the unit in brackets; to place one, negate y for a bottom-side part, rotate by r counter-clockwise, add the part's x,y. Pads: shape width x height; smd on the part's side, far side on the other; paste and mask are expansions set on the pad)
0603 [mm]
  rect 0.8x0.95 smd: 1(-0.8,0) 2(0.8,0)
  silkscreen extent -1.37,-0.64 1.37,0.64, body extent -0.8,-0.4 0.8,0.4, height 0.55
0603_Diode [mm]
  rect 0.8x0.8 smd: 1(-0.8,0) 2(0.8,0)
  silkscreen extent -2.03,-0.89 2.03,1.02
HDR2X3 [mm] "Connector; Header; 3x2 Position"
  rect 1.5x1.5 hole 0.9: 1(0,0)
  round 1.5 hole 0.9: 2(0,2.54) 3(2.54,0) 4(2.54,2.54) 5(5.08,0) 6(5.08,2.54)
  silkscreen extent -1.27,-1.27 6.35,3.81
HDR2X8 [mm] "Connector; Header; 8x2 Position"
  rect 1.5x1.5 hole 0.9: 1(0,0)
  round 1.5 hole 0.9: 2(0,2.54) 3(2.54,0) 4(2.54,2.54) 5(5.08,0) 6(5.08,2.54) 7(7.62,0) 8(7.62,2.54) 9(10.16,0) 10(10.16,2.54) 11(12.7,0) 12(12.7,2.54) 13(15.24,0) 14(15.24,2.54) 15(17.78,0) 16(17.78,2.54)
  silkscreen extent -1.27,-1.27 19.05,3.81
HEADER16 [mil]
  rect 60x60 hole 31.5: 1(0,0)
  round 60 hole 31.5: 2(100,0) 3(0,-100) 4(100,-100) 5(0,-200) 6(100,-200) 7(0,-300) 8(100,-300) 9(0,-400) 10(100,-400) 11(0,-500) 12(100,-500) 13(0,-600) 14(100,-600) 15(0,-700) 16(100,-700)
  silkscreen extent -130,-900 230,200
QFP80P900X900X120-32N [mm]
  rect 1.475x0.6 smd: 1(-4.238,2.8) 2(-4.238,2) 3(-4.238,1.2) 4(-4.238,0.4) 5(-4.238,-0.4) 6(-4.238,-1.2) 7(-4.238,-2) 8(-4.238,-2.8) 17(4.238,-2.8) 18(4.238,-2) 19(4.238,-1.2) 20(4.238,-0.4) 21(4.238,0.4) 22(4.238,1.2) 23(4.238,2) 24(4.238,2.8)
  rect 0.6x1.475 smd: 9(-2.8,-4.238) 10(-2,-4.238) 11(-1.2,-4.238) 12(-0.4,-4.238) 13(0.4,-4.238) 14(1.2,-4.238) 15(2,-4.238) 16(2.8,-4.238) 25(2.8,4.238) 26(2,4.238) 27(1.2,4.238) 28(0.4,4.238) 29(-0.4,4.238) 30(-1.2,4.238) 31(-2,4.238) 32(-2.8,4.238)
  silkscreen extent -4.77,-3.15 3.15,4.2, body extent -4.5,-4.5 4.5,4.5, height 1.2
SOIC127P600X175-16N [mm]
  rect 1.525x0.65 smd: 1(-2.712,4.445) 2(-2.712,3.175) 3(-2.712,1.905) 4(-2.712,0.635) 5(-2.712,-0.635) 6(-2.712,-1.905) 7(-2.712,-3.175) 8(-2.712,-4.445) 9(2.712,-4.445) 10(2.712,-3.175) 11(2.712,-1.905) 12(2.712,-0.635) 13(2.712,0.635) 14(2.712,1.905) 15(2.712,3.175) 16(2.712,4.445)
  silkscreen extent -3.47,-4.95 1.6,5.12, body extent -3.01,-4.95 3.01,4.95, height 1.75
SOIC_16_Narrow [mm]
  rect 1.525x0.65 smd: 1(-2.712,4.445) 2(-2.712,3.175) 3(-2.712,1.905) 4(-2.712,0.635) 5(-2.712,-0.635) 6(-2.712,-1.905) 7(-2.712,-3.175) 8(-2.712,-4.445) 9(2.712,-4.445) 10(2.712,-3.175) 11(2.712,-1.905) 12(2.712,-0.635) 13(2.712,0.635) 14(2.712,1.905) 15(2.712,3.175) 16(2.712,4.445)
  silkscreen extent -3.47,-4.95 1.6,5.12, body extent -3.01,-4.95 3.01,4.95, height 1.75
SOP65P640X120-14N [mm]
  rect 1.475x0.45 smd: 1(-2.938,1.95) 2(-2.938,1.3) 3(-2.938,0.65) 4(-2.938,0) 5(-2.938,-0.65) 6(-2.938,-1.3) 7(-2.938,-1.95) 8(2.938,-1.95) 9(2.938,-1.3) 10(2.938,-0.65) 11(2.938,0) 12(2.938,0.65) 13(2.938,1.3) 14(2.938,1.95)
  silkscreen extent -3.67,-2.5 1.85,2.52, body extent -3.2,-2.5 3.2,2.5, height 1.13
SOP65P780X200-20N [mm]
  rect 1.8x0.45 smd: 1(-3.55,2.925) 2(-3.55,2.275) 3(-3.55,1.625) 4(-3.55,0.975) 5(-3.55,0.325) 6(-3.55,-0.325) 7(-3.55,-0.975) 8(-3.55,-1.625) 9(-3.55,-2.275) 10(-3.55,-2.925) 11(3.55,-2.925) 12(3.55,-2.275) 13(3.55,-1.625) 14(3.55,-0.975) 15(3.55,-0.325) 16(3.55,0.325) 17(3.55,0.975) 18(3.55,1.625) 19(3.55,2.275) 20(3.55,2.925)
  silkscreen extent -4.45,-3.6 2.3,3.6, body extent -4.03,-3.6 3.77,3.6, height 1.9
SOT-363-6 [mm]
  rect 0.6x0.6 smd: 1(-0.9,0.75) 3(-0.9,-0.75) 4(0.9,-0.75) 6(0.9,0.75)
  rect 0.6x0.4 smd: 2(-0.9,0) 5(0.9,0)
  silkscreen extent -1.8,0.7 -1.7,0.8, body extent -1.16,-1 1.16,1, height 1.2
TP [mm] "Test Point"
  rect 1.5x1.5 hole 0.9: 1(0,0)
  silkscreen extent -1.27,-1.27 1.27,1.27

## Part data
B1 B2 B3 B4 B6 B7 B8 B9: "TC7SB3157CFU MUX 2 in 1 out with control bit", Manufacturer_Name=Nexperia, Manufacturer_Part_Number=PMP3906AYSH, Mouser Part Number=771-PMP3906AYSH, Datasheet Link=https://assets.nexperia.com/documents/data-sheet/PMP3906AYS.pdf, Geometry.Height=1.1mm, Mouser Price/Stock=https://www.mouser.co.uk/ProductDetail/Nexperia/PMP3906AYSH?qs=vvQtp7zwQdPhl6IciBiaKA%3D%3D
B5 B10: "TEXAS INSTRUMENTS - AM26C32CDR - Receiver RS422/423, 4 Drivers, 4.5V-5.5V supply, SOIC-16", Manufacturer_Name="Texas Instruments", Mouser Part Number=595-AM26C32CDR, Datasheet Link=https://www.ti.com/lit/ds/symlink/am26c32.pdf?ts=1601403310434&ref_url=https%253A%252F%252Fwww.ti.com%252Fproduct%252FAM26C32, Geometry.Height=1.75mm, Manufacturer_Part_Number=AM26C32CDR, Mouser Price/Stock=https://www.mouser.co.uk/ProductDetail/Texas-Instruments/AM26C32CDR?qs=LgZHeZZt5MVmFjCK4imaTA%3D%3D
C1 C3 C5: library part CL10B105KA8NNNL, "Samsung Electro-Mechanics 0603 1uf"
C2 C4 C6: library part CL10B104JB8NNNC, "Samsung Electro-Mechanics 0603 100nf"
H1 H2 H3: "16 Pin 2x8 Through Hold IDC Connector", Color=Black, Manufacturer=Samtec, Manufacturer Part Number=TST-108-01-G-D, Max Operating Temperature=125°C, Min Operating Temperature=-55°C, Supplier Part Number 1=SAM10835-ND, Category="Headers and Wire Housings", ComponentLink1Description=https://datasheet.ciiva.com/739/tst-mkt-739845.pdf?src-supplier=Digi-Key, ComponentLink1URL=https://datasheet.ciiva.com/739/tst-mkt-739845.pdf?src-supplier=Digi-Key, ComponentLink2Description=https://datasheet.ciiva.com/10018/htst-10018510.pdf?src-supplier=Avnet, ComponentLink2URL=https://datasheet.ciiva.com/10018/htst-10018510.pdf?src-supplier=Avnet, Connector Type="Male Pin", Contact Material=Bronze, Contact Mating Length=0.25inch, Contact Plating=Gold, Depth=9.27mm, Gender=Male, Housing Color=Black, Housing Material=Polyester, Length=27.94mm, Mount="Through Hole", Number of Contacts=16, Number of Positions=16, Number of Rows=2, Orientation=Straight, Packaging=Rail/Tube, Pitch=2.54mm, Pricing 1="1=2.85000, 10=2.73600, 100=2.28000, 500=1.93800, 1000=1.65300, 5000=1.48200 (USD)", REACH SVHC="No SVHC", RoHS=Yes, Row Spacing=0.1inch, Stock 1=227, Supplier 1=Digi-Key, Termination=Solder
H4: "6 Pin 2X3 Through Hole Header"
IC1: "Integrated Circuit", Manufacturer_Name=Microchip, Manufacturer_Part_Number="AVR64DD32-I/PT | MULTI-VOLTAGE I/O", Datasheet Link=https://www.microchip.com/en-us/product/AVR64DD32, Height=1.2mm
LED1 LED2 LED3 LED4 LED5 LED6 LED7 LED8 LED9 LED10 LED11 LED12 LED13 LED14 LED15 LED16 LED17 LED18 LED19 LED20 LED21 LED22 LED23 LED24 LED25 LED26 LED27 LED28 LED29 LED30 LED31 LED32 LED33 LED34 LED35 LED36 LED37: library part 150060GS75000, "Wurth Elektronik 0603 green", Case Code (Imperial)=0603, Case Code (Metric)=1608, Color=Green, Forward Current=30mA, Forward Voltage=3.2V, Manufacturer="Wurth Electronics", Max Operating Temperature=85°C, Min Operating Temperature=-40°C, Package Quantity=4000, Test Current=20mA, Case/Package=0603, Category=LEDs, ComponentLink1Description=https://datasheet.ciiva.com/29562/150060gs75000-29562868.pdf?src-supplier=Digi-Key, ComponentLink1URL=https://datasheet.ciiva.com/29562/150060gs75000-29562868.pdf?src-supplier=Digi-Key, ComponentLink2Description=https://datasheet.ciiva.com/29279/759427-da-01-en-chipled-0603-w-kl-gruen-150060gs75000-29279201.pdf?src-supplier=Conrad, ComponentLink2URL=https://datasheet.ciiva.com/29279/759427-da-01-en-chipled-0603-w-kl-gruen-150060gs75000-29279201.pdf?src-supplier=Conrad, ComponentLink3Description=https://datasheet.ciiva.com/29562/150060gs75000-29562869.pdf?src-supplier=Digi-Key, ComponentLink3URL=https://datasheet.ciiva.com/29562/150060gs75000-29562869.pdf?src-supplier=Digi-Key, ComponentLink4Description=https://datasheet.ciiva.com/29562/150060gs75000-29562870.pdf?src-supplier=Digi-Key, ComponentLink4URL=https://datasheet.ciiva.com/29562/150060gs75000-29562870.pdf?src-supplier=Digi-Key, Dominant Wavelength=520nm, Height=0.7mm, Lead Free="Lead Free", Length=1.6mm, Lens Style=Clear,Rectangular, Luminous Intensity=430mcd, Manufacturer Part Number=150060GS75000, Mount="Surface Mount", Packaging="Tape and Reel", Pricing 1="1=0.14000, 50=0.13300, 100=0.11400, 500=0.09900 (USD)", REACH SVHC=Unknown, RoHS=Yes, Stock 1=71509, Supplier 1=Digi-Key, Viewing Angle=140°, Wavelength=520nm, Width=0.8mm
R1 R2 R3 R4 R5 R6 R7 R8 R9 R10 R11 R12 R13 R14 R15 R16 R17 R18 R19 R20 R21 R22 R23 R24 R25 R26 R27 R28 R29 R30 R31 R32 R33 R34 R35 R36 R37 R38 R39 R40 R41 R42 R43 R44 R45 R46 R47 R48 R49 R50 R51 R52 R53 R54 R55 R56 R57 R58 R59 R60 R61 R62 R63 R64 R65 R66 R67 R68 R69 R70 R71 R72 R73 R74 R75 R76 R77 R78 R79 R80 R81 R82 R83 R84 R85 R86 R87 R88 R89 R90 R91 R92 R93 R94 R95 R96 R97 R98 R99 R100 R101 R102 R103 R104 R105 R106 R107 R108 R109 R110 R111 R112 R113 R114 R115 R116 R117 R118 R119 R120 R121 R122 R123 R124 R125 R150 R151 R152 R153 R154 R155 R156 R157 R168 R169 R170 R171 R172 R173 R174 R175 R176 R177 R181 R182 R183 R184 R185 R186 R187 R188 R189 R190 R191 R192 R193 R194: library part RC0603JR-070RL, "YAGEO 0603 0 ohm", Manufacturer_Name=KEMET, Mouser Part Number=603-RC0603JR-070RL, Datasheet Link=https://datasheet.datasheetarchive.com/originals/distributors/Datasheets_SAMA/902f9e387b938f871d31120f5fc1d65e.pdf, Geometry.Height=0.55mm, Manufacturer_Part_Number=RC0603JR-070RL, Mouser Price/Stock=https://www.mouser.co.uk/ProductDetail/YAGEO/RC0603JR-070RL?qs=2cAdsCoAWRGWyPcuXgGiXQ%3D%3D
R126 R127 R128 R129 R130 R131 R132 R133 R134 R135 R136 R137 R138 R139 R140 R141 R142 R143 R144 R145 R146 R147 R148 R149 R158 R159 R160 R161 R162 R163 R164 R165 R166 R167 R178 R179 R180: library part RC0603FR-13180RL, "YAGEO 0603 180 ohm", Manufacturer_Name=KEMET, Manufacturer_Part_Number=RC0603JR-070RL, Mouser Part Number=603-RC0603JR-070RL, Datasheet Link=https://datasheet.datasheetarchive.com/originals/distributors/Datasheets_SAMA/902f9e387b938f871d31120f5fc1d65e.pdf, Geometry.Height=0.55mm, Mouser Price/Stock=https://www.mouser.co.uk/ProductDetail/YAGEO/RC0603JR-070RL?qs=2cAdsCoAWRGWyPcuXgGiXQ%3D%3D
TP1 TP2 TP3 TP4: Color=Black, Manufacturer=Samtec, Manufacturer Part Number=TST-105-01-G-D, Max Operating Temperature=125°C, Min Operating Temperature=-55°C, Category="Headers and Wire Housings", ComponentLink1Description=https://datasheet.ciiva.com/739/tst-mkt-739845.pdf?src-supplier=Digi-Key, ComponentLink1URL=https://datasheet.ciiva.com/739/tst-mkt-739845.pdf?src-supplier=Digi-Key, ComponentLink2Description=https://datasheet.ciiva.com/10018/htst-10018510.pdf?src-supplier=Avnet, ComponentLink2URL=https://datasheet.ciiva.com/10018/htst-10018510.pdf?src-supplier=Avnet, Connector Type="Male Pin", Contact Material=Bronze, Contact Mating Length=0.25inch, Contact Plating=Gold, Depth=9.27mm, Gender=Male, Housing Color=Black, Housing Material=Polyester, Length=27.94mm, Mount="Through Hole", Number of Contacts=16, Number of Positions=16, Number of Rows=2, Orientation=Straight, Packaging=Rail/Tube, Pitch=2.54mm, Pricing 1="1=2.85000, 10=2.73600, 100=2.28000, 500=1.93800, 1000=1.65300, 5000=1.48200 (USD)", REACH SVHC="No SVHC", RoHS=Yes, Row Spacing=0.1inch, Stock 1=227, Supplier 1=Digi-Key, Termination=Solder
U1: "8-Bit Shift Registers With 3-State Output Registers, D0016A, LARGE T&R", Case/Package=SOIC, F @ Nom Voltage(Max)(Mhz)=28, Frequency=42MHz, Generic Part Number=SN74HC595, ICC @ Nom Voltage(Max)(mA)=0.08, Manufacturer="Texas Instruments", Max Input Current=1uA, Max Operating Temperature=85°C, Max Supply Voltage=6V, Min Operating Temperature=-40°C, Min Supply Voltage=2V, Operating Supply Voltage=5V, Operating Temperature Range(C)="-40 to 85", Package Quantity=2500, Quiescent Current=8uA, Rating=Military, Supplier Part Number 1=296-14857-1-ND, tpd @ Nom Voltage(Max)(ns)=34, Voltage(Nom)(V)=6, 3-State Output=Yes, Bits=4, Code_JEDEC="MS-012 variation AC", ComponentLink1Description=https://datasheet.ciiva.com/15093/getdatasheetpartid-134875-15093436.pdf?src-supplier=Verical, ComponentLink1URL=https://datasheet.ciiva.com/15093/getdatasheetpartid-134875-15093436.pdf?src-supplier=Verical, ComponentLink2Description=https://datasheet.ciiva.com/22696/1831198-22696812.pdf?src-supplier=Element14, ComponentLink2URL=https://datasheet.ciiva.com/22696/1831198-22696812.pdf?src-supplier=Element14, ComponentLink3Description=https://datasheet.ciiva.com/34301/916385-34301758.pdf?src-supplier=Jameco, ComponentLink3URL=https://datasheet.ciiva.com/34301/916385-34301758.pdf?src-supplier=Jameco, ComponentLink4Description=https://datasheet.ciiva.com/26866/sn74hc595dr-26866161.pdf?src-supplier=IIIC, ComponentLink4URL=https://datasheet.ciiva.com/26866/sn74hc595dr-26866161.pdf?src-supplier=IIIC, ComponentLink5Description=https://datasheet.ciiva.com/1886/sn74hc595-1886279.pdf?src-supplier=Digi-Key, ComponentLink5URL=https://datasheet.ciiva.com/1886/sn74hc595-1886279.pdf?src-supplier=Digi-Key, ComponentLink6Description=https://datasheet.ciiva.com/1886/sn74hc595-1886280.pdf?src-supplier=Digi-Key, ComponentLink6URL=https://datasheet.ciiva.com/1886/sn74hc595-1886280.pdf?src-supplier=Digi-Key, ComponentLink7Description=https://datasheet.ciiva.com/1886/sn74hc595-1886281.pdf?src-supplier=Digi-Key, ComponentLink7URL=https://datasheet.ciiva.com/1886/sn74hc595-1886281.pdf?src-supplier=Digi-Key, ComponentLink8Description=https://datasheet.ciiva.com/1509/1831198-1509483.pdf?src-supplier=Element14, ComponentLink8URL=https://datasheet.ciiva.com/1509/1831198-1509483.pdf?src-supplier=Element14, ComponentLink9Description=https://datasheet.ciiva.com/46381/1886142-46381835.pdf?src-supplier=Element14, ComponentLink9URL=https://datasheet.ciiva.com/46381/1886142-46381835.pdf?src-supplier=Element14, ComponentLink10Description=https://datasheet.ciiva.com/14294/sn74hc595-14294989.pdf?src-supplier=Avnet, ComponentLink10URL=https://datasheet.ciiva.com/14294/sn74hc595-14294989.pdf?src-supplier=Avnet, ComponentLink11Description=https://datasheet.ciiva.com/14294/sn74hc595-14294991.pdf?src-supplier=Avnet, ComponentLink11URL=https://datasheet.ciiva.com/14294/sn74hc595-14294991.pdf?src-supplier=Avnet, ComponentLink12Description=https://datasheet.ciiva.com/46435/1831198-46435871.pdf?src-supplier=Element14, ComponentLink12URL=https://datasheet.ciiva.com/46435/1831198-46435871.pdf?src-supplier=Element14, Contact Plating=Gold, DatasheetVersion=SCLS041H, Direction=Unidirectional, Height=1.58mm, Input Type=CMOS, Lead Free="Lead Free", Length=9.9mm, Logic Function="Shift Register", Manufacturer Part Number=SN74HC595DR, Mount="Surface Mount", Number of Bits=8, Number of Bits per Element=8, Number of Circuits=4, Number of Elements=1, Number of Output Lines=10, Number of Pins=16, Output Drive (IOL/IOH)(Max)(mA)=7.8/-7.8, Output Type=CMOS, PackageReference=D0016A, PackageVersion=http://www.ti.com/lit/ml/mpds178g/mpds178g.pdf, Packaging="Tape and Reel", Pricing 1="1=0.51000, 10=0.43300, 100=0.32300, 500=0.25380, 1000=0.19611 (USD)", Propagation Delay=250ns, Radiation Hardening=No, REACH SVHC="No SVHC", RoHS=Yes, Stock 1=38406, Supplier 1=Digi-Key, Technology Family=HC, Termination=SMD/SMT, Turn-On Delay Time=250ns, VCC(Max)(V)=6, VCC(Min)(V)=2, Weight=0.004998oz, Width=3.91mm
U2: "Octal Buffers/Drivers With 3-State Outputs", Manufacturer_Name="Texas Instruments", Mouser Part Number=595-SN74ABT240ADBR, Datasheet Link=http://www.ti.com/lit/gpn/sn74abt240a, Geometry.Height=2mm, Manufacturer_Part_Number=SN74ABT240ADBR, Mouser Price/Stock=https://www.mouser.co.uk/ProductDetail/Texas-Instruments/SN74ABT240ADBR?qs=JHHQeKcAU3Dt82k%252BVyiYdw%3D%3D
U3 U4: "Hex Inverters", Manufacturer_Name="Texas Instruments", Mouser Part Number=595-SN74AC04PWR, Datasheet Link=http://www.ti.com/lit/gpn/sn74ac04, Geometry.Height=1.2mm, Manufacturer_Part_Number=SN74AC04PWR, Mouser Price/Stock=https://www.mouser.co.uk/ProductDetail/Texas-Instruments/SN74AC04PWR?qs=RZS%252BpEsUn7pRvPNqsga4SA%3D%3D

## Free pads (board coordinates)
  round 200 hole 170: 37(200,200) 37(200,3800) 37(5400,200) 37(5400,3800)

## Via types
v1: diameter 50, hole 28, Top Layer to Bottom Layer, 291 vias

## Nets (pads, with @x,y where several pads share a name; then routed paths per layer and width w, separated by ;. In a path a pad name is that pad's centre, name@x,y a point inside that pad or via, vN(x,y) a via of type N, cw(c..) or ccw(c..) an arc to the next point about the centre after c; other vN are vias at no path point)
75ALS194EN: R107.2 R155.2 | length 4928.4
  Top Layer w10: R107.2@1320,258.5 1320,95.86 1325.86,90 v1(1530,90) ; v1(3280,1080) v1(3280,1390) ; v1(3360,2680) 3367.65,2687.65 3367.65,2707.65 3420,2760 R155.2@3420,2928.5
  Bottom Layer w10: v1(1530,90) 1630,90 1825,285 2998.79,285 3215,501.21 3215,744.14 3220.86,750 3354.14,750 3360,755.86 3360,910 3280,990 v1(3280,1080) ; v1(3280,1390) 3276.72,1393.28 3276.72,1423.28 3230,1470 3230,2000 3360,2130 v1(3360,2680)
+3.3: H3.3 R159.2 TP1.1 | length 5211.3
  Top Layer w10: H3.3@200,1800 115.86,1800 110,1805.86 110,2834.14 115.86,2840 280,2840 350,2910 v1(350,3220)
  Bottom Layer w10: v1(350,3220) 3594.14,3220 3600,3225.86 3600,3310 TP1.1@3608.5,3318.5 ; TP1.1@3600,3320 3758.5,3320 R159.2@3760,3318.5
+5: B1.5 B2.5 B3.5 B4.5 B5.16 B6.5 B7.5 B8.5 B9.5 B10.16 C1.1 C2.1 C3.1 C4.1 C5.1 C6.1 H3.1 H4.2 IC1.10 IC1.18 IC1.28 R126.2 R127.2 R128.2 R129.2 R130.2 R131.2 R132.2 R133.2 R134.2 R135.2 R136.2 R137.2 R138.2 R139.2 R140.2 R141.2 R142.2 R143.2 R144.2 R145.2 R146.2 R147.2 R148.2 R149.2 R158.2 R160.2 R161.2 R162.2 R163.2 R164.2 R165.2 R166.2 R167.2 R178.2 R179.2 R180.2 U1.16 U2.20 U3.14 U4.14 | length 8026.9
  Top Layer w10: U2.20@559.76,2675.16 559.76,2719.76 v1(600,2760) ; IC1.10@1161.26,493.15 1161.26,575.4 1167.12,581.26 IC1.18@1406.85,581.26 1408.11,580 v1(1510,580) ; IC1.28@1255.75,826.85 1255.75,1004.92 1270,1019.18 v1(1270,1030) ; U4.14@1565.67,2386.77 1565.67,2445.67 v1(1590,2470) ; B8.5@2481.93,1520 v1(2606.5,1520) ; B6.5@2481.93,1850 v1(2606.5,1850) ; B3.5@2481.93,2180 v1(2606.5,2180) ; B1.5@2481.93,2510 v1(2606.5,2510) ; v1(2720,1070) 2712.35,1077.65 2712.35,1093.51 2710,1095.86 2710,1129.14 2715.86,1135 B5.16@2826.77,1135 ; B4.5@3301.93,1520 v1(3426.5,1520) ; B7.5@3301.93,1850 v1(3426.5,1850) ; B9.5@3301.93,2180 v1(3426.5,2180) ; B2.5@3301.93,2510 v1(3426.5,2510) ; v1(3310,680) 3320,680 3350,710 B10.16@3413.54,710 ; U1.16@4370,1743.23 4463.23,1743.23 v1(4470,1750) ; U3.14@4565.67,536.77 4565.67,594.14 4571.53,600 v1(4640,600)
  Bottom Layer w10: R133.2@780,3318.5 R132.2@880,3318.5 R131.2@980,3318.5 R130.2@1080,3318.5 R129.2@1180,3318.5 R128.2@1280,3318.5 R127.2@1380,3318.5 R126.2@1480,3318.5 R147.2@1620,3318.5 R145.2@1770,3318.5 1845,3318.5 ; C4.1@1148.5,740 1150,738.5 1150,555.86 1155.86,550 1320,550 1331.5,561.5 C2.1@1331.5,600 ; C1.1@1331.5,740 C6.1@1331.5,670 C2.1@1331.5,600 ; v1(1510,580) 1500,580 1480,600 C2.1@1331.5,600 ; v1(1850,3470) 1850,3323.5 1845,3318.5 ; R178.2@3120,3318.5 R180.2@2910,3318.5 R179.2@2690,3318.5 R143.2@2510,3318.5 R142.2@2370,3318.5 R149.2@2190,3318.5 R148.2@2060,3318.5 R146.2@1920,3318.5 1845,3318.5 ; v1(3300,3320) 3330,3320 3331.5,3318.5 R144.2@3420,3318.5 ; R160.2@3820,1218.5 3829.34,1227.84 3880.66,1227.84 3890,1218.5 ; R134.2@3820,2468.5 R135.2@3960,2468.5 4025,2468.5 ; v1(3850,1120) 3857.65,1127.65 3874.31,1127.65 3890,1143.34 3890,1218.5 ; v1(3850,3390) 3850,3324.36 3855.86,3318.5 R158.2@3940,3318.5 ; v1(4030,2680) 4025,2675 4025,2468.5 ; R167.2@4720,1218.5 R166.2@4600,1218.5 R165.2@4470,1218.5 R164.2@4340,1218.5 R163.2@4220,1218.5 R162.2@4100,1218.5 R161.2@3960,1218.5 3890,1218.5 ; R141.2@4720,2468.5 R140.2@4600,2468.5 R139.2@4470,2468.5 R138.2@4340,2468.5 R137.2@4220,2468.5 R136.2@4090,2468.5 4025,2468.5
CPU_CS: R80.2 R109.2 R153.2 | length 5037
  Top Layer w10: R80.2@1031.5,1450 v1(1130,1450) v1(1270,1450) ; v1(1130,1820) 1130,1770 1120,1760 895.86,1760 880,1775.86 880,2994.14 895.86,3010 1394.14,3010 1559.14,2845 1914.14,2845 1920,2850.86 R153.2@1920,2928.5 ; v1@1260,170 R109.2@1260,258.5
  Bottom Layer w10: v1(1130,1450) v1(1130,1820) ; v1(1260,160) 1260,254.14 1254.14,260 1040,260 1030,270 1030,820 1170,960 1170,1360 1242.35,1432.35 1244.14,1432.35 1261.8,1450 v1(1270,1450)
CPU_D0: R69.1 R85.1 U2.2 | length 2693.9
  Top Layer w10: U2.2@280.24,2649.57 135.86,2649.57 130,2643.71 130,2020 140,2010 704.14,2010 710,2004.14 v1(710,1900) v1@688.69,1900 ; R69.1@631.5,1900 v1@688.69,1900 ; v1@702.37,1913.68 v1@688.69,1900 ; v1(1095,1150) 1095,1076.5 R85.1@1100,1071.5
  Bottom Layer w10: v1(710,1900) 940,1900 1080,1760 1080,1310 1100,1290 1100,1155 v1(1095,1150)
CPU_D1: R71.1 R87.1 U2.4 | length 2651.3
  Top Layer w10: U2.4@278.5,2600.12 U2.4@280.24,2598.39 278.62,2600 150.86,2600 145,2594.14 145,2035 155,2025 735,2025 745,2015 745,1835 v1(710,1800) R71.1@631.5,1800 ; R87.1@1040,1071.5 v1(1040,1190)
  Bottom Layer w10: v1(710,1800) 1000,1800 1040,1760 v1(1040,1190)
CPU_D2: R74.1 R89.1 U2.6 | length 2597.1
  Top Layer w10: U2.6@280.24,2547.2 278.5,2548.94 238.59,2548.94 237.53,2550 170,2550 160,2540 160,2050 170,2040 741.21,2040 760,2021.21 760,1705.86 754.14,1700 v1(710,1700) R74.1@631.5,1700 ; R89.1@980,1071.5 v1(980,1150)
  Bottom Layer w10: v1(710,1700) 994.14,1700 1000,1694.14 1000,1240 983.28,1223.28 983.28,1153.28 v1(980,1150)
CPU_D3: R77.1 R91.1 U2.8 | length 3280.4
  Top Layer w10: U2.8@278.5,2497.76 U2.8@280.24,2496.02 180.86,2496.02 175,2490.17 175,2060.86 180.86,2055 755,2055 775,2035 775,1615 760,1600 v1(710,1600) R77.1@631.5,1600 ; v1(310,870) R91.1@768.5,870
  Bottom Layer w10: v1(310,870) 310.14,869.86 358.6,869.86 381.75,893.01 ccw(c375,900.38) 385,900.38 385,1579.14 405.86,1600 v1(710,1600)
CPU_D4: R79.1 R93.1 U2.11 | length 2664.9
  Top Layer w10: v1(370,810) R93.1@768.5,810 ; U2.11@560,2444.61 U2.11@559.76,2444.84 645.16,2444.84 790,2300 790,1505.86 784.14,1500 v1(730,1500) R79.1@631.5,1500
  Bottom Layer w10: v1(370,810) 370,850 400,880 400,1480 420,1500 v1(730,1500)
CPU_D5: R81.1 R95.1 U2.13 | length 2793
  Top Layer w10: v1(430,750) R95.1@768.5,750 ; U2.13@559.76,2496.02 643.98,2496.02 799.14,2496.02 805,2490.17 805,1405.86 799.14,1400 v1(730,1400) R81.1@631.5,1400
  Bottom Layer w10: v1(430,750) 430,1394.14 435.86,1400 v1(730,1400)
CPU_D6: R83.1 R97.1 U2.15 | length 2818.1
  Top Layer w10: v1(490,690) R97.1@768.5,690 ; U2.15@559.76,2547.2 561.5,2548.94 601.41,2548.94 602.47,2550 670,2550 814.14,2550 820,2544.14 820,1305.86 814.14,1300 v1(730,1300) R83.1@631.5,1300
  Bottom Layer w10: v1(490,690) 490,1294.14 495.86,1300 v1(730,1300)
CPU_D7: R84.1 R99.1 U2.17 | length 2714.8
  Top Layer w10: U2.17@559.76,2598.39 694.14,2598.39 821.61,2598.39 835,2585 835,1205.86 829.14,1200 v1(750,1200) R84.1@631.5,1200 ; v1(620,630) v1@631.5,630 ; v1@631.5,628.5 v1@631.5,630 ; R99.1@758.5,620 R99.1@768.5,630 v1@631.5,630
  Bottom Layer w10: v1(620,630) 620,1120 640,1140 744.14,1140 750,1145.86 v1(750,1200)
CPU_nInt: R75.2 R111.2 R152.2 | length 4458.4
  Top Layer w10: v1(1140,160) R111.2@1140,258.5 ; v1(1220,1650) R75.2@1031.5,1650 1031.5,1704.14 1025.64,1710 875.86,1710 850,1735.86 850,3024.14 875.86,3050 1441.21,3050 1562.71,2928.5 R152.2@1620,2928.5
  Bottom Layer w10: v1(1140,160) 980,160 970,170 970,810 1140,980 1140,1200 1120,1220 1120,1371.21 1180,1431.21 1180,1490 1165.61,1504.39 1165.61,1624.78 1187.13,1646.3 1216.3,1646.3 v1(1220,1650)
CPU_Reset: R82.2 R88.2 R154.2 | length 3871.5
  Top Layer w10: R82.2@1031.5,1350 v1(1240,1350) 1285.15,1350 1320,1384.85 1320,1670 1250,1740 885.86,1740 865,1760.86 865,3009.14 885.86,3030 1420,3030 1590,2860 1764.14,2860 1770,2865.86 R154.2@1770,2928.5 ; R88.2@1420,1081.5 1420,1280 1440,1300 v1(1440,1360)
  Bottom Layer w10: v1(1240,1350) 1434.14,1350 1440,1355.86 v1(1440,1360)
CPU_RnW: R78.2 R110.2 R150.2 R194.2 | length 5380.5
  Top Layer w10: R78.2@1031.5,1550 v1(1220,1550) ; v1(1190,110) 1200,120 R110.2@1200,258.5 ; R194.2@1791.5,2460 1940,2460 1950,2470 v1(1950,2530) 1950,2744.14 1955.86,2750 2120,2750 2200,2830 2200,2918.5 R150.2@2190,2928.5
  Bottom Layer w10: v1(1190,110) 1190,115.86 1210,135.86 1210,184.14 1174.14,220 1015.86,220 1010,225.86 1010,821.21 1155,966.21 1155,1385 1224.14,1454.14 1224.14,1545.86 v1(1220,1550) 1294.14,1550 1300,1555.86 1300,1790 1170,1920 875.86,1920 870,1925.86 870,2510 880,2520 980,2520 1020,2560 1900,2560 1922.35,2537.65 1942.35,2537.65 v1(1950,2530)
CPU_RnW_Inverted: R151.2 R193.1 | length 875
  Top Layer w10: R193.1@1791.5,2400 v1(1940,2400) ; v1(2060,2800) R151.2@2060,2928.5
  Bottom Layer w10: v1(1940,2400) 2054.14,2400 2060,2405.86 2060,2450 2120,2510 2120,2794.14 2114.14,2800 v1(2060,2800)
Diff_Channel_In_0: R12.2 R41.1 | length 2516
  Top Layer w10: R41.1@2418.5,1040 2260.86,1040 2255,1045.86 2255,1283.79 2286.21,1315 2885,1315 2900,1330 2900,1514.14 2905.86,1520 v1(2950,1520) ; v1(2890,1680) 2890,2560 2930,2600 R12.2@3020,2600
  Bottom Layer w10: v1(2890,1680) 2950,1620 v1(2950,1520)
Diff_Channel_In_0_A: B5.2 R17.1 | length 3893.3
  Top Layer w10: v1(2440,1140) 2495,1085 B5.2@2613.23,1085 ; v1(4770,1130) 4780.82,1130 4793.25,1142.43 4794.14,1142.43 4800,1148.28 4800,1694.14 4805.86,1700 R17.1@5218.5,1700
  Bottom Layer w10: v1(2440,1140) 2432.35,1147.65 2432.35,1163.73 2430.22,1165.86 2430.22,1320 2642.57,1320 2722.57,1240 3065.15,1240 3115.15,1190 3270,1190 3410,1050 3618.79,1050 3630,1038.79 3630,1035.86 3635.86,1030 4680,1030 4770,1120 v1(4770,1130)
Diff_Channel_In_0_B: B5.1 R18.2 | length 3613.4
  Top Layer w10: v1(2520,1180) 2565,1135 B5.1@2613.23,1135
  Bottom Layer w10: v1(2520,1180) 2520,1294.14 2525.86,1300 2630,1300 2705,1225 3058.93,1225 3111.17,1172.76 3260,1172.76 3402.76,1030 3610,1030 3610,1020.86 3615.86,1015 4723.79,1015 4830,1121.21 4830,1630.44 4835.86,1636.3 5207.76,1636.3 5218.5,1647.05 R18.2@5218.5,1650
Diff_Channel_In_1: R36.2 R46.1 | length 1609.9
  Top Layer w10: R46.1@2418.5,920 2245.86,920 2240,925.86 2240,1290 2280,1330 2870,1330 2880,1340 2880,1600 2890,1610 R36.2@3020,1610
Diff_Channel_In_1_A: B5.6 R19.1 | length 5877.1
  Top Layer w10: B5.6@2613.23,885 2565,885 2545.86,865.86 2225.86,865.86 2180,820 2180,145.86 2185.86,140 3160,140 3203,183 3734.57,183 3777.57,140 4924.14,140 4930,145.86 v1(4930,200.89) ; v1(4950,1150) 4870,1150 4860,1160 4860,1594.14 4865.86,1600 R19.1@5218.5,1600
  Bottom Layer w10: v1(4930,200.89) 4930,790 4900,820 4900,1144.14 4905.86,1150 v1(4950,1150)
Diff_Channel_In_1_B: B5.7 R20.2 | length 5842.5
  Top Layer w10: B5.7@2613.23,835 2608.23,830 2560,830 2540,850 2240,850 2195,805 2195,165 2205,155 3140,155 3183,198 3740.79,198 3783.79,155 4725,155 4744.18,174.18 4744.18,274.14 4738.32,280 4645.86,280 4625.86,260 v1(4620,260)
  Bottom Layer w10: v1(4620,260) 4645,285 4879.14,285 4885,290.86 4885,736.21 4845,776.21 4845,1544.14 4850.86,1550 R20.2@5218.5,1550
Diff_Channel_In_2: R45.2 R51.1 | length 2209.9
  Top Layer w10: v1(2960,2000) 3003.39,2000 3009.25,1994.14 3009.25,1940.75 R45.2@3020,1930 ; R51.1@3051.5,880 3061.5,870 3100,870 3125,895 3403.71,895 3409.57,900.86 3409.57,975.43 3490,1055.86 v1(3490,1300)
  Bottom Layer w10: v1(2960,2000) 3050,2000 3050,1940 3070,1920 3209.14,1920 3215,1914.14 3215,1345 3230,1330 3314.14,1330 3320,1324.14 3320,1280 3430,1280 3460,1250 3485,1250 3490,1255 v1(3490,1300)
Diff_Channel_In_2_A: B5.10 R21.1 | length 5843.7
  Top Layer w10: B5.10@2826.77,835 2894.14,835 2900,829.14 2900,715.86 2894.14,710 2235.86,710 2230,704.14 2230,190.86 2235.86,185 3105,185 3148,228 3757,228 3800,185 4485,185 4520,220 4520,304.14 4525.86,310 4794.14,310 4800,304.14 v1(4800,240) ; v1(5070,1500) R21.1@5218.5,1500
  Bottom Layer w10: v1(4800,240) 4858.79,240 4900,281.21 4900,750 4870,780 4870,1490 4880,1500 v1(5070,1500)
Diff_Channel_In_2_B: B5.9 R22.2 | length 5524.1
  Top Layer w10: B5.9@2826.77,785 2826.77,735.86 2820.91,730 2215.86,730 2210,724.14 2210,180 2220,170 3120,170 3163,213 3747,213 3790,170 4610,170 4640,200 4679.11,200 v1(4680,200.89)
  Bottom Layer w10: v1(4680,200.89) 4850.89,200.89 4915,265 4915,760 4885,790 4885,1440 4895,1450 R22.2@5218.5,1450
Diff_Channel_In_3: R52.1 R58.2 | length 2272.6
  Top Layer w10: R58.2@3020,2270 3020,2334.14 3025.86,2340 3324.14,2340 3326.49,2342.35 3387.35,2342.35 v1(3395,2350) ; R52.1@3051.5,1000 3124.14,1000 3154.14,1030 3384.14,1030 3390,1035.86 v1(3390,1330)
  Bottom Layer w10: v1(3390,1330) 3380,1330 3330,1380 3330,1452.68 3322.68,1460 3261.21,1460 3250.61,1470.61 3250.61,1980.61 3345,2075 3345,2093.79 3391.5,2140.28 3391.5,2346.5 v1(3395,2350)
Diff_Channel_In_3_A: B5.14 R23.1 | length 6389
  Top Layer w10: B5.14@2826.77,1035 2945,1035 v1(3010,1100) ; v1(3020,690) 2250.86,690 2245,684.14 2245,214.64 2259.64,200 3081.21,200 3124.21,243 3763.21,243 3806.21,200 4110,200 v1(4170,260) ; v1(5070,1400) R23.1@5218.5,1400
  Bottom Layer w10: v1(3010,1100) 3010,1089.18 3020,1079.18 v1(3020,690) ; v1(4170,260) 4170,171.75 4176.75,165 4943.61,165 4965,186.39 4965.32,240.03 4950,255.35 4950,791.21 4920,821.21 4920,1084.14 4925.86,1090 4980,1090 5010,1120 5010,1190 4990,1210 4945.86,1210 4940,1215.86 4940,1394.14 4945.86,1400 v1(5070,1400)
Diff_Channel_In_3_B: B5.15 R24.2 | length 6605.8
  Top Layer w10: v1(2820,640) 2812.35,647.65 2792.35,647.65 2765,675 2265.86,675 2260,669.14 2260,220.86 2265.86,215 3075,215 3118,258 3774.5,258 3817.5,215 4045,215 4080,250 v1(4080,260) ; B5.15@2826.77,1085 2924.14,1085 2930,1090.86 2930,1110 3000.86,1180.86 3009.14,1180.86 v1(3010,1180)
  Bottom Layer w10: v1(2820,640) 2830,630 3094.14,630 3100,635.86 3100,700 3060,740 3060,1150 3037.65,1172.35 3017.65,1172.35 v1(3010,1180) ; v1(4080,260) 4080,156.75 4086.75,150 4949.82,150 4985,185.18 4985,255 4970,270 4970,808.79 4940,838.79 4940,1064.14 4945.86,1070 5000,1070 5025,1095 5025,1215 5010,1230 4965.86,1230 4960,1235.86 4960,1344.14 4965.86,1350 R24.2@5218.5,1350
Diff_Channel_In_4: R11.2 R63.1 | length 3421.3
  Top Layer w10: v1(2090,900) 2120,930 2120,1400 2150,1430 2150,1470 2120,1500 2060,1500 2020,1540 2020,1930 1930,1930 1900,1960 1900,2038.79 1941.21,2080 2049.14,2080 2055,2085.86 2055,2589.14 2065.86,2600 R11.2@2200,2600 ; v1(2300,610) 2300,650 2310,660 2690,660 2760,590 R63.1@2978.5,590
  Bottom Layer w10: v1(2090,900) 2097.65,892.35 2097.65,876.49 2100,874.14 2100,795.86 2105.86,790 2294.14,790 2300,784.14 v1(2300,610)
Diff_Channel_In_4_A: B10.2 R25.1 | length 4151.6
  Top Layer w10: B10.2@3203.23,660 3105.86,660 3100,665.86 3100,830 3150,880 3657.57,880 3915.86,621.72 3915.86,374.14 v1(3920,370) ; v1(5040,1300) R25.1@5218.5,1300
  Bottom Layer w10: v1(3920,370) 3970,370 4017.07,322.93 4020,320 4020,145.86 4030.86,135 4956.03,135 5000,178.97 5000.32,270 5000.32,279.68 4990,290 4990,810 4960,840 4960,1043.54 4965.86,1049.39 5030.61,1049.39 5040,1058.79 v1(5040,1300)
Diff_Channel_In_4_B: B10.1 R26.2 | length 4078.9
  Top Layer w10: B10.1@3203.23,710 3125.86,710 3120,715.86 3120,823.54 3156.46,860 3650,860 3890,620 3890,420 3860,390 3860,330 3870,320 3930,320 v1(3960,290)
  Bottom Layer w10: v1(3960,290) 3960,126.75 3966.75,120 4970,120 5020,170 5020,300 5015,300 5005,310 5005,816.21 4975,846.21 4975,1020.36 4985.86,1031.21 5060,1031.21 5060,1244.14 5065.86,1250 R26.2@5218.5,1250
Diff_Channel_In_5: R35.2 R64.1 | length 3838.3
  Top Layer w10: v1(2140,2270) R35.2@2200,2270 ; v1(2490,480) 2500.82,480 2510.82,470 R64.1@2978.5,470 ; v1(2600,1250) 2602.43,1252.43 2602.43,1294.14 2608.28,1300 2930,1300 v1(2960,1330)
  Bottom Layer w10: v1(2140,2270) 2140,2260 2100,2220 2100,2110.86 2105.86,2105 2135,2105 2155,2085 2155,2005 2140,1990 2110.86,1990 2105,1984.14 2105,1752.57 2030,1677.57 2030,1499.97 2107.6,1499.97 2120,1487.57 2120,1450.86 2165.86,1405 2680,1405 2755,1480 2810,1480 2840,1450 2840,1350 2853.79,1336.21 2953.79,1336.21 v1(2960,1330) ; v1(2490,480) 2482.35,487.65 2482.35,503.51 2480,505.86 2480,830 2607.65,957.65 2607.65,1242.35 v1(2600,1250)
Diff_Channel_In_5_A: B10.6 R27.1 | length 3577.7
  Top Layer w10: B10.6@3203.23,460 3158.21,460 3120,421.79 3120,287.64 3134.64,273 3780.71,273 3793.71,260 v1(3840,260) ; v1(5110,1200) R27.1@5218.5,1200
  Bottom Layer w10: v1(3840,260) 3840,254.14 3860,234.14 3860,111.75 3866.75,105 4985,105 5035,155 5035,315 5020,330 5020,840 4990,870 4990,1001.64 4995.86,1007.5 5057.5,1007.5 5080,1030 5080,1160 5110,1190 v1(5110,1200)
Diff_Channel_In_5_B: B10.7 R28.2 | length 3514.4
  Top Layer w10: B10.7@3203.23,410 3140.86,410 3135,404.14 3135,293.86 3140.86,288 3701.43,288 3733.43,320 v1(3740,320)
  Bottom Layer w10: v1(3740,320) 3732.35,312.35 3732.35,296.49 3730,294.14 3730,210 3850,90 4998.79,90 5050,141.21 5050,338.79 5035,353.79 5035,846.21 5005,876.21 5005,984.14 5010.86,990 5070,990 5095,1015 5095,1124.14 5100.86,1130 5110,1130 5130,1150 R28.2@5218.5,1150
Diff_Channel_In_6: R44.2 R65.1 | length 4723.3
  Top Layer w10: R44.2@2200,1930 2200,1960 v1(2230,1990) ; R65.1@3631.5,450 3740,450 v1(3780,410) ; v1(3880,1460) 4004.14,1460 4040,1424.14 4040,975.86 4020,955.86 v1(4020,950)
  Bottom Layer w10: v1(2230,1990) 2230,1945.86 2224.14,1940 2140.86,1940 2135,1934.14 2135,1728.79 2065,1658.79 2065,1540 2070,1535 2115,1535 2150,1500 2150,1470 2185,1435 2666.21,1435 2741.21,1510 2826.21,1510 2870,1466.21 2870,1405.86 2875.86,1400 2990,1400 3140,1250 3301.21,1250 3426.21,1125 3605,1125 3620,1140 3620,1280 3649.34,1309.34 3764.14,1309.34 3770,1315.2 3770,1411.62 3792.71,1434.34 3857.38,1434.34 3880,1456.96 v1(3880,1460) ; v1(3780,410) 3785.86,410 3805.86,430 3860,430 3860,560 3880,580 4104.14,580 4110,585.86 4110,720 4020,810 v1(4020,950)
Diff_Channel_In_6_A: B10.10 R29.1 | length 2989.1
  Top Layer w10: B10.10@3416.77,410 3510,410 3590,330 v1(3640,330) ; v1(5050,920) 5050,1094.14 5055.86,1100 R29.1@5218.5,1100
  Bottom Layer w10: v1(3640,330) 3640,260 3825,75 5005,75 5065,135 5065,355 5050,370 v1(5050,920)
Diff_Channel_In_6_B: B10.9 R30.2 | length 2861.3
  Top Layer w10: B10.9@3416.77,360 3484.14,360 3504.14,340 v1(3510,340)
  Bottom Layer w10: v1(3510,340) 3520,340 3800,60 5011.21,60 5080,128.79 5080,365 5065,380 5065,835 5090,860 5090,980 5120,1010 5120,1044.14 5125.86,1050 R30.2@5218.5,1050
Diff_Channel_In_7: R57.2 R66.1 | length 3146.6
  Top Layer w10: R57.2@2200,1610 2200,1660 2220,1680 v1(2760,1680) ; v1(3170,1730) v1(3350,1730) ; v1(3620,1840) 3615,1835 3615,1620 3650,1585 3650,1050 3792.35,907.65 3792.35,887.65 v1(3800,880) ; R66.1@3631.5,570 3760,570 3790,600 v1(3810,600)
  Bottom Layer w10: v1(2760,1680) 2760,1714.14 2775.86,1730 v1(3170,1730) ; v1(3350,1730) 3357.65,1737.65 3373.51,1737.65 3385.86,1750 3604.14,1750 3610,1755.86 3610,1814.14 3612.35,1816.49 3612.35,1832.35 v1(3620,1840) ; v1(3800,880) 3840,840 3840,630 v1(3810,600)
Diff_Channel_In_7_A: B10.14 R33.1 | length 3822
  Top Layer w10: B10.14@3416.77,610 3680,610 v1(3720,650) ; v1(5120,790) 5100,810 5100,990 5110,1000 R33.1@5218.5,1000
  Bottom Layer w10: v1(3720,650) 3680,610 3405.86,610 3400,604.14 3400,291.21 3411.21,280 3558.79,280 3793.79,45 5017.43,45 5095,122.57 5095,385 5080,400 5080,720 5116.72,756.72 5116.72,786.72 v1(5120,790)
Diff_Channel_In_7_B: B10.15 R34.2 | length 3693.6
  Top Layer w10: B10.15@3416.77,660 3574.35,660 3581.06,666.72 3582.85,666.72 3594.83,678.7 v1(3605.65,678.7)
  Bottom Layer w10: v1(3605.65,678.7) 3598.49,678.7 3579.79,660 3385.86,660 3380,654.14 3380,290 3411.21,258.79 3554.14,258.79 3560,252.93 3560,250 3780,30 5023.64,30 5110,116.36 5110,395 5095,410 5095,695 5110,710 5160,710 5170,720 5170,850 5135.86,850 5130,855.86 5130,944.14 5135.86,950 R34.2@5218.5,950
Digital_Input_0: R14.1 R90.2 R169.2 | length 5886.3
  Top Layer w10: R90.2@1480,1081.5 v1@1480,1150 ; v1(1690,220) v1(1840,220) ; R14.1@3507.99,2420 3538.74,2420 3610,2348.74 3610,2220 3640,2190 3640,2030 3575,1965 3575,1806.21 3600,1781.21 3600,1610 3635,1575 3635,966.21 3651.21,950 v1(3690,950) 3690,911.21 3980,621.21 3980,590 4020,550 4098.5,550 R169.2@4108.5,560
  Bottom Layer w10: v1(1480,1160) 1480,990 1690,780 v1(1690,220) ; v1(1840,220) 1890,270 3005,270 3230,495 3230,729.14 3235.86,735 3615,735 3690,810 v1(3690,950)
Digital_Input_1: R38.1 R92.2 R171.2 | length 4417.2